# Allegro board 123.brd
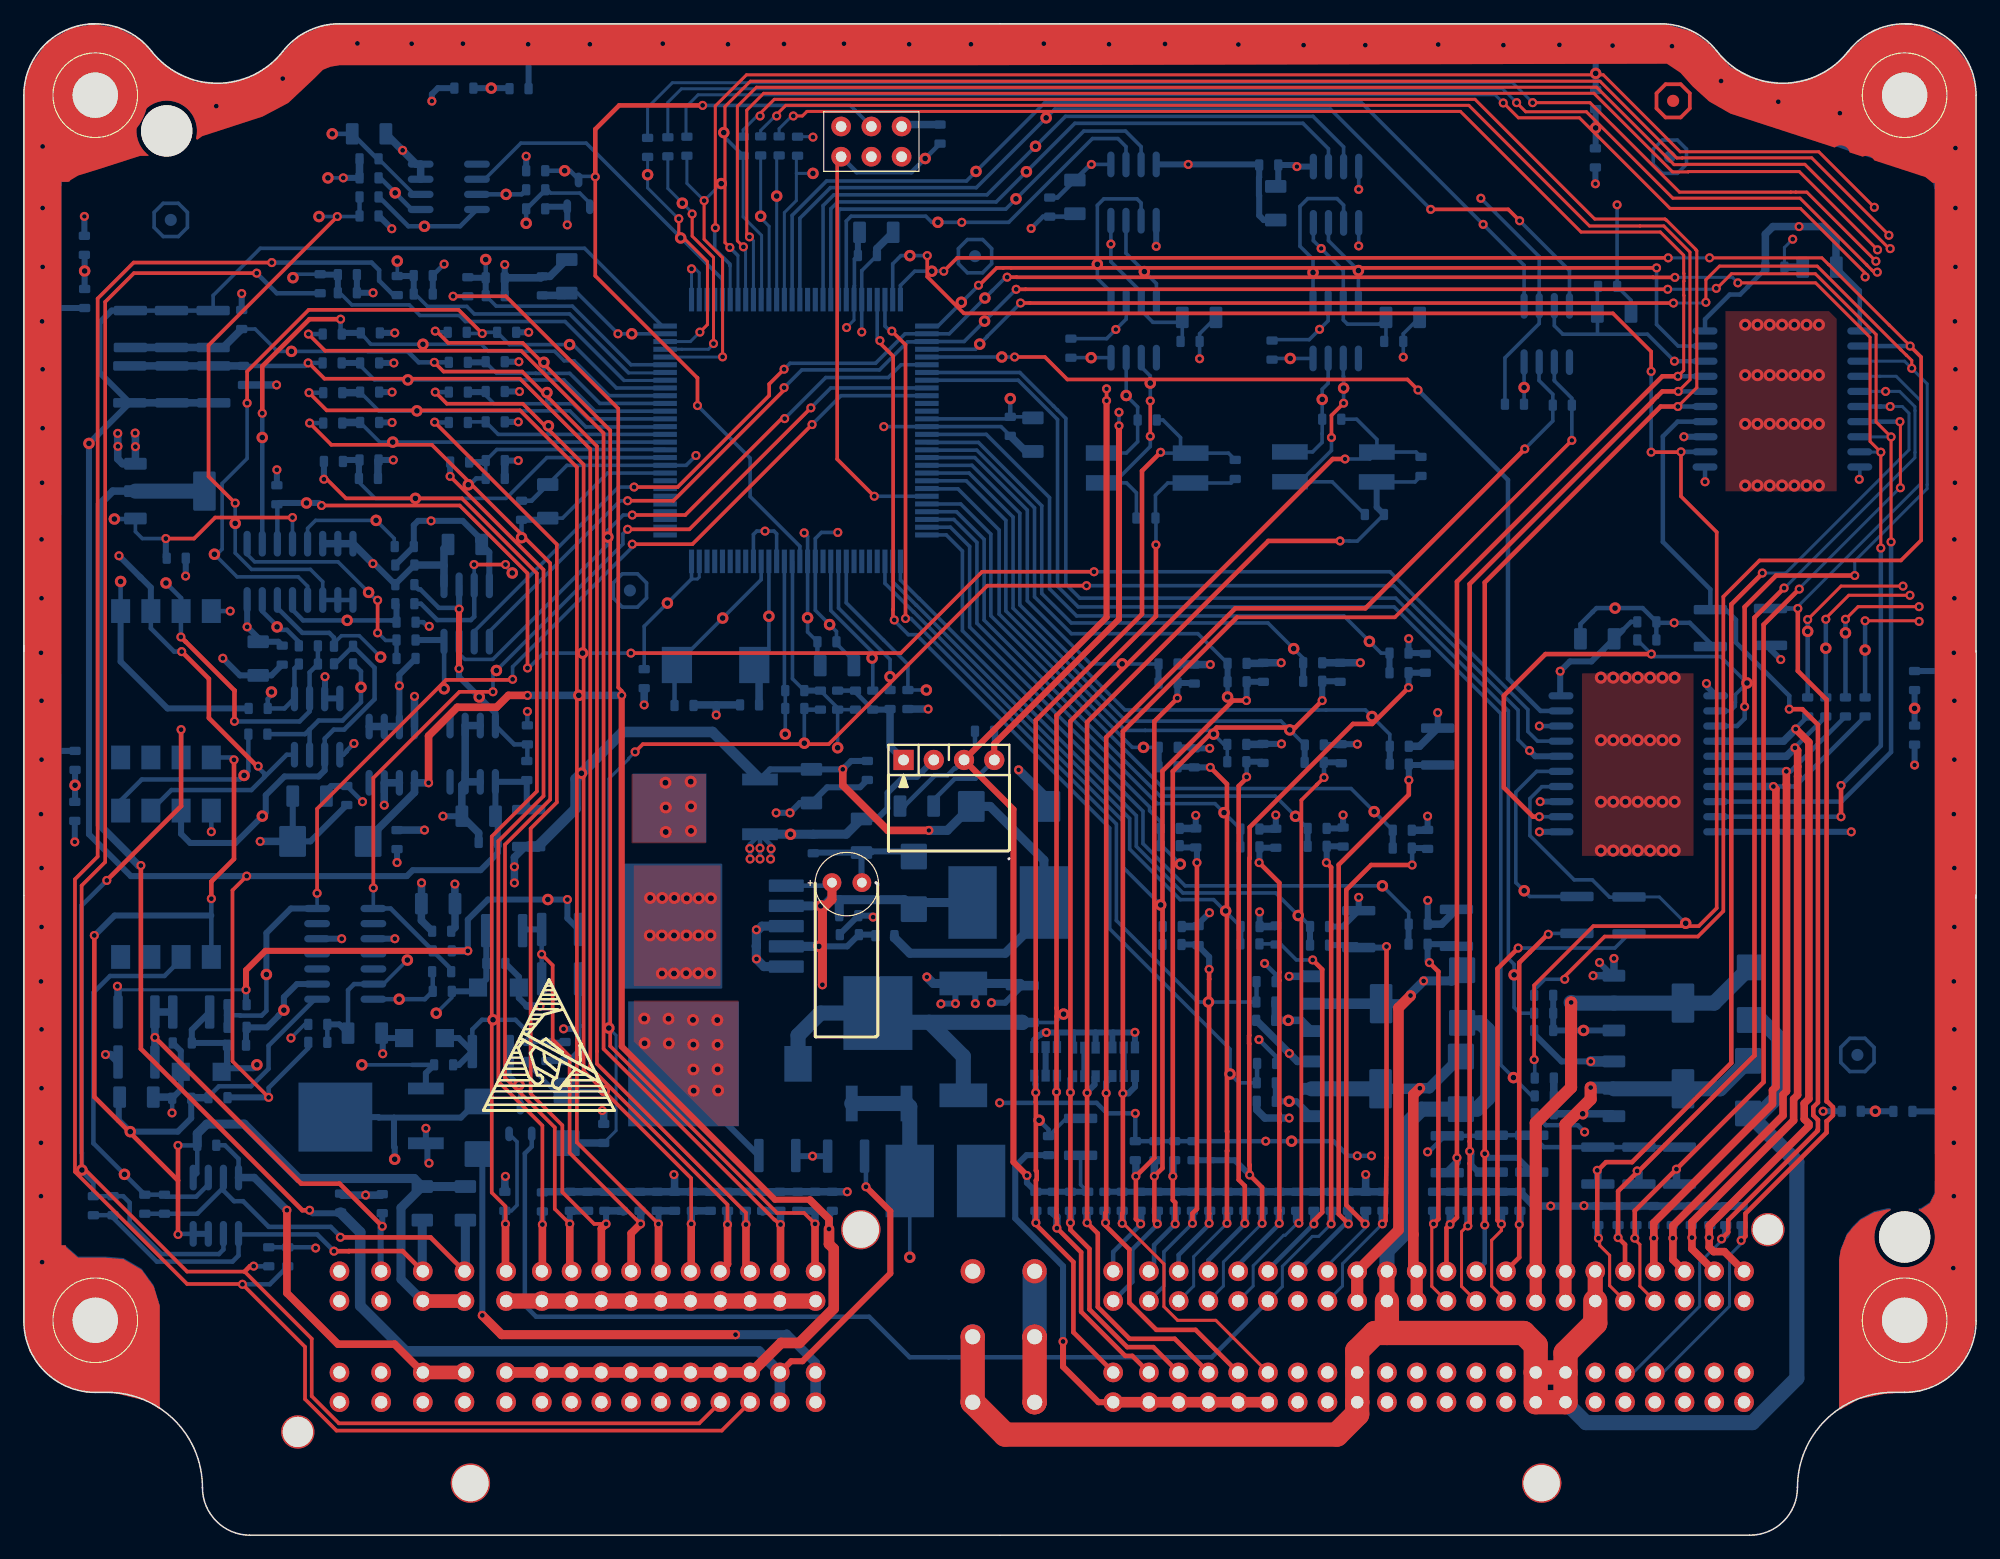
[diagram p0: board, top side]
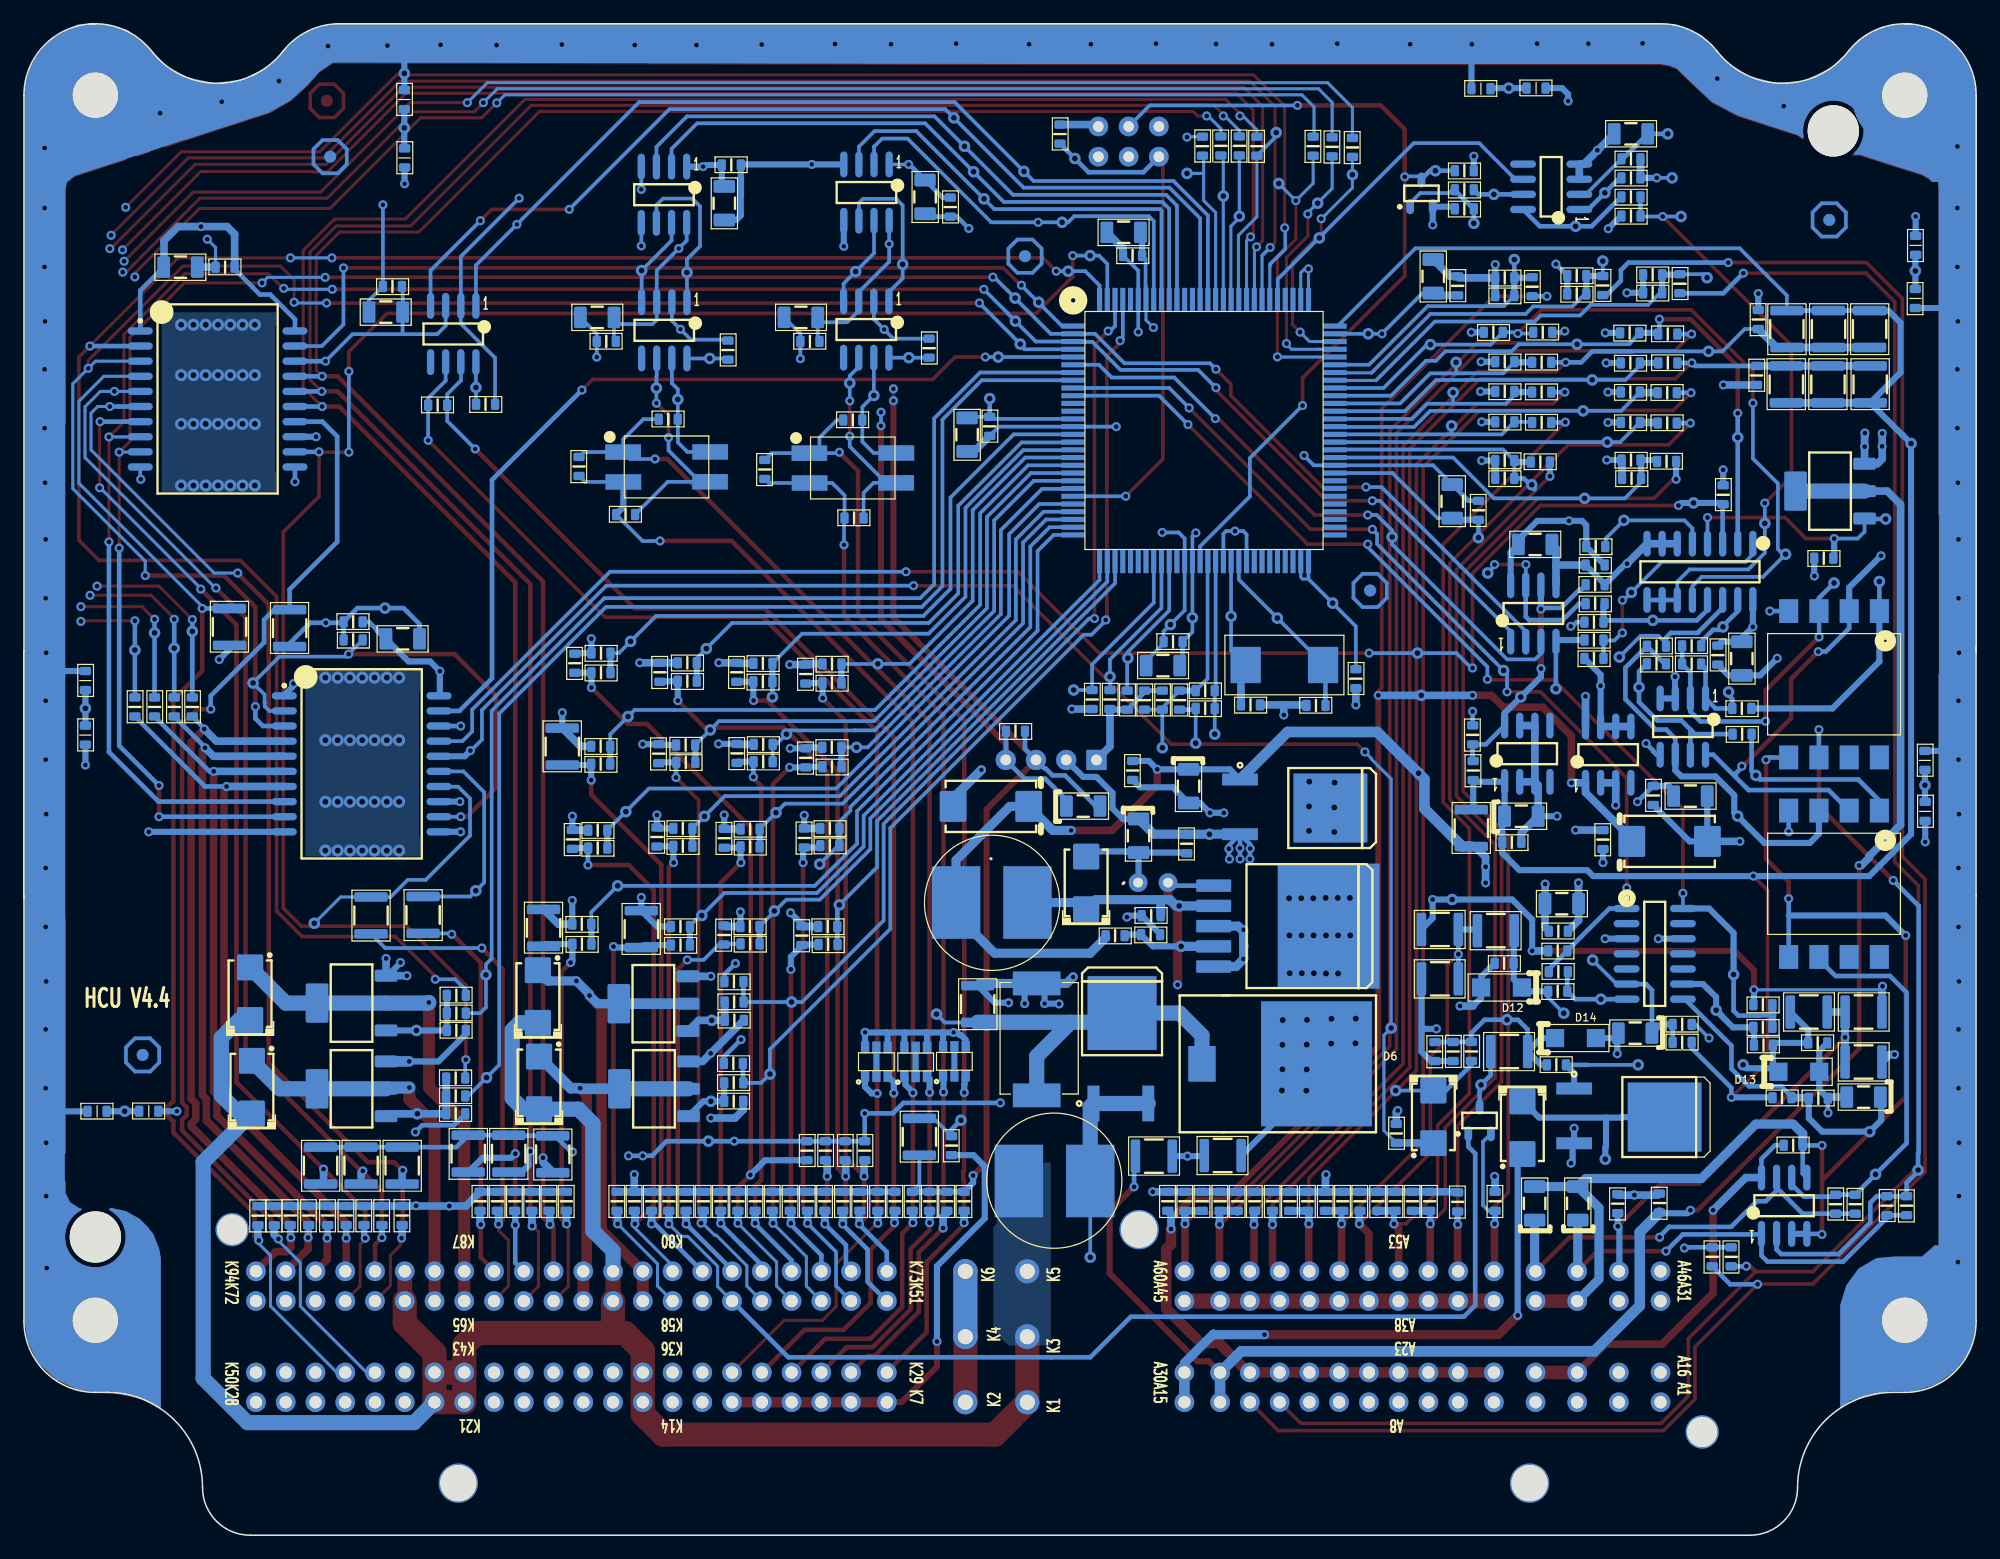
[diagram p1: board, bottom side, seen from below]

Outline 164.02 x 127 mm; copper layers: TOP, GND02, POWER05, BOTTOM. Coordinates in mm from the lower left corner of the outline.
Outline path: 0,121 arc(1.76,125.24) 6,127 ; 0,74.25 0,121.01 ; 0,74.75 0.01,74.75 0.01,53.75 ; 0.01,53.75 0.01,18 arc(1.76,13.76) 6.01,12 7.01,12 arc(12.66,9.66) 15.01,4 arc(16.18,1.17) 19.01,0 82.01,0 145.01,0 arc(147.84,1.17) 149.01,4 arc(151.35,9.66) 157.01,12 158.01,12 arc(162.25,13.76) 164.01,18 164.01,53.75 ; 5.49,126.98 arc(8.4,126.5) 10.73,124.69 arc(16.25,122) 21.77,124.69 arc(23.87,126.39) 26.5,127 ; 26.52,127 82.01,127 ; 71.68,54.74 71.59,54.83 ; 82.76,56.83 82.78,56.85 ; 137.5,127 82,127 ; 137.52,127 arc(140.15,126.39) 142.25,124.69 arc(147.76,122) 153.28,124.69 arc(155.61,126.5) 158.53,126.98 ; 158.01,127 arc(162.25,125.24) 164.01,121 ; 164.01,74.25 164.01,121.01 ; 164.02,74.31 164.02,53.57 163.99,53.54

## Placement (name value [footprint] x y rotation side)
C1  10% 103  [0603]  29 90.35 0 bottom
C2  10% 103  [0603]  29.06 93.5 0 bottom
C3  10% 103  [0603]  29.06 96.05 0 bottom
C4  10% 103  [0603]  29.11 101.03 0 bottom
C5  10% 103  [0603]  27.18 104.39 0 bottom
C6  10% 103  [0603]  39.61 90.3 0 bottom
C7  10% 103  [0603]  39.61 93.55 0 bottom
C8  10% 103  [0603]  39.61 96.1 0 bottom
C9  10% 103  [0603]  40.57 101.08 0 bottom
C10  10% 103  [0603]  33.56 104.29 0 bottom
C11  10% 103  [0603]  29.06 98.5 0 bottom
C12  10% 103  [0603]  39.61 98.6 0 bottom
C13  10% 103  [0603]  29.01 110.85 0 bottom
C14  4.7uF 16V  [1206]  19.69 73.66 270 bottom
C15  10% 104  [0603]  21.71 73.95 270 bottom
C16  10% 103  [0603]  39.61 104.15 0 bottom
C17  10% 103  [0603]  32.11 73.67 0 bottom
C18  4.7uF 16V  [1206]  37.06 83.25 180 bottom
C19  10% 103  [0603]  32.11 76.72 0 bottom
C20  10% 104  [0603]  32.01 81.52 0 bottom
C21  10% 103  [0603]  32.01 79.87 180 bottom
C22  4.7uF 16V  [1206]  24.01 62.1 180 bottom
C23  10% 104  [0603]  23.91 73.2 180 bottom
C24  10% 104  [0603]  27.13 62.15 270 bottom
C25  10% 104  [0603]  26.86 73.22 0 bottom
C28  4.7uF 16V  [1206]  98.74 102.33 180 bottom
C29  10% 104  [0603]  97.98 100.31 180 bottom
C30  4.7uF 16V  [1206]  105.17 111.92 270 bottom
C31  10% 104  [0603]  104.59 115.13 180 bottom
C32  4.7uF 16V  [1206]  115.85 102.33 180 bottom
C33  10% 104  [0603]  115.09 100.31 180 bottom
C34  4.7uF 16V  [1206]  133.61 102.77 0 bottom
C35  10% 104  [0603]  133.06 104.93 0 bottom
C36  4.7uF 16V  [1206]  88.3 112.45 270 bottom
C37  10% 104  [0603]  86.19 111.59 270 bottom
C38  103 30V  [0603]  112.73 28.06 90 bottom
C39  10% 103  [0603]  40.42 28.06 90 bottom
C40  103 30V  [0603]  114.18 28.06 90 bottom
C41  10% 103  [0603]  43.57 28.01 90 bottom
C42  103 30V  [0603]  105.48 28.06 90 bottom
C43  10% 103  [0603]  45.92 28.06 90 bottom
C44  103 30V  [0603]  98.18 28.06 90 bottom
C45  10% 103  [0603]  48.82 28.06 90 bottom
C46  103 30V  [0603]  118.43 28.06 90 bottom
C47  10% 103  [0603]  53.22 28.06 90 bottom
C48  103 30V  [0603]  109.83 28.06 90 bottom
C49  10% 103  [0603]  56.17 28.06 90 bottom
C50  103 30V  [0603]  108.38 28.06 90 bottom
C51  10% 103  [0603]  62.07 28.06 90 bottom
C52  103 30V  [0603]  99.63 28.06 90 bottom
C53  10% 103  [0603]  65.02 28.06 90 bottom
C54  103 30V  [0603]  101.13 28.06 90 bottom
C55  10% 103  [0603]  59.12 28.06 90 bottom
C56  103 30V  [0603]  102.58 28.06 90 bottom
C57  10% 103  [0603]  60.62 28.06 90 bottom
C58  103 30V  [0603]  106.93 28.06 90 bottom
C59  10% 103  [0603]  67.92 28.06 90 bottom
C60  103 30V  [0603]  111.28 28.06 90 bottom
C61  103 30V  [0603]  104.03 28.06 90 bottom
C62  103 30V  [0603]  96.73 28.06 90 bottom
C64  103 30V  [0603]  95.23 28.06 90 bottom
C66  103 30V  [0603]  93.78 28.06 90 bottom
C67  10% 103  [0603]  144.35 26.85 90 bottom
C68  10% 103  [0603]  142.98 26.85 90 bottom
C69  103 30V  [0603]  141.64 26.86 90 bottom
C70  103 30V  [0603]  124.24 28.06 90 bottom
C71  10% 103  [0603]  51.77 28.06 90 bottom
C72  103 30V  [0603]  140.09 26.86 90 bottom
C73  10% 103  [0603]  30.11 27.86 90 bottom
C74  103 30V  [0603]  125.69 28.06 90 bottom
C75  103 30V  [0603]  138.49 26.86 90 bottom
C76  10% 1nf  [0603]  85.03 28.06 90 bottom
C77  103 30V  [0603]  136.94 26.86 90 bottom
C78  10% 1nf  [0603]  86.48 28.06 90 bottom
C79  103 30V  [0603]  133.94 26.86 90 bottom
C80  10% 1nf  [0603]  87.93 28.06 90 bottom
C81  10% 1nf  [0603]  89.38 28.06 90 bottom
C82  10% 1nf  [0603]  90.83 28.06 90 bottom
C83  103 30V  [0603]  122.79 28.06 90 bottom
C84  10% 1nf  [0603]  92.28 28.06 90 bottom
C85  103 30V  [0603]  132.24 26.86 90 bottom
C86  103 30V  [0603]  121.34 28.06 90 bottom
C87  103 30V  [0603]  135.44 26.86 90 bottom
C88  103 30V  [0603]  119.89 28.06 90 bottom
C89  103 30V  [0603]  26.61 27.91 90 bottom
C90  10% 104  [0603]  41.82 86.12 90 bottom
C91  4.7uF 16V  [1206]  44.02 86.87 90 bottom
C92  10% 104  [0603]  43.57 104.98 270 bottom
C93  4.7uF 16V  [1206]  45.62 105.78 270 bottom
C94  10% 470pf  [0603]  64.77 70.97 0 bottom
C95  10% 1nf  [0603]  69.87 70.17 270 bottom
C96  10% 0.22uf  [0603]  68.37 70.17 270 bottom
C97  10% 4.7nf  [0603]  64.77 69.47 0 bottom
C98  10% 104  [0603]  82.88 93.17 270 bottom
C99  4.7uF 16V  [1206]  84.78 92.47 270 bottom
C100  22P 5%  [0603]  60.97 69.77 0 bottom
C101  22P 5%  [0603]  55.47 69.72 180 bottom
C102  10% 104  [0603]  67.47 75.07 180 bottom
C103  4.7uF 16V  [1206]  68.32 73.07 180 bottom
C104  10% 104  [0603]  70.87 107.53 0 bottom
C105  4.7uF 16V  [1206]  71.62 109.48 0 bottom
C106  4.7uF 16V  [1206]  29.01 117.75 180 bottom
C107  10% 103  [0603]  115.81 59.24 0 bottom
C108  10% 103  [0603]  108.66 59.39 0 bottom
C109  10% 103  [0603]  103.01 59.34 0 bottom
C110  10% 103  [0603]  96.31 59.39 0 bottom
C111  10% 103  [0603]  117.15 51.34 0 bottom
C112  10% 103  [0603]  108.86 51.14 0 bottom
C113  10% 103  [0603]  103.02 51.14 0 bottom
C114  10% 103  [0603]  96.48 51.14 0 bottom
C115  10% 103  [0603]  96.14 66.2 0 bottom
C116  10% 103  [0603]  101.91 66.45 0 bottom
C117  10% 103  [0603]  108.42 66.4 0 bottom
C118  10% 103  [0603]  115.56 66.29 0 bottom
C119  10% 103  [0603]  115.53 74.12 0 bottom
C120  10% 103  [0603]  108.28 73.31 0 bottom
C121  10% 103  [0603]  101.93 73.26 0 bottom
C122  10% 103  [0603]  96.13 73.21 0 bottom
C123  4.7uF 16V  [1206]  132.19 75.32 0 bottom
C124  10% 103  [0603]  147.11 106.55 180 bottom
C125  4.7uF 16V  [1206]  150.86 106.55 0 bottom
C126  10% 103  [0603]  136.35 76.74 180 bottom
C127  22uF/35V TAN  [7343]  25.76 58.3 0 bottom
C128  100uF 50V  [RC100]  67.87 57.38 180 top
C129  10% 103  [0603]  69.31 52.06 180 bottom
C130  100uF/16V TAN  [7343]  82.78 61.24 180 bottom
C131  10% 104  [0603]  31.36 58.45 90 bottom
C132  10% 103  [0603]  70.87 64.26 90 bottom
C133  33uF 10V  [1206-C]  66.17 62.94 90 bottom
C134  10% 103  [0603]  66.32 58.1 90 bottom
C135  33uF 10V  [1206-C]  70.37 58.77 90 bottom
C136  33uF 10V  [1206-C]  75.02 61.27 0 bottom
C137  10% 103  [0603]  80.71 67.55 0 bottom
C138  10% 103  [0603]  45.47 40.64 90 bottom
C139  33uF 10V  [1206-C]  38.21 60.42 0 bottom
C140  10% 103  [0603]  39.01 58.21 0 bottom
C141  10% 105  [0603]  15.37 32.77 180 bottom
C142  103 30V  [0603]  20.58 23.39 90 bottom
C143  10% 1nf  [0603]  39.65 48.05 0 bottom
C144  33uF 10V  [1206-C]  9.46 36.81 180 bottom
C145  4.7uF 16V  [1206]  34.81 53.06 180 bottom
C146  10% 1nf  [0603]  13.31 41.36 180 bottom
C147  10% 103  [0603]  35.11 50.75 180 bottom
C148  10% 33pf  [0603]  7.5 27.69 270 bottom
C149  10% 33pf  [0603]  11.82 27.81 270 bottom
C150  103 30V  [0603]  22.18 23.39 90 bottom
C151  33uF 10V  [1206-C]  28.65 42.19 180 bottom
C152  22uF 10V  [1206-C]  33.47 27.88 270 bottom
C153  22uF 10V  [1206-C]  37.1 27.88 270 bottom
C154  10% 0.68uf 50V  [0603]  86.09 32.74 90 bottom
C155  10% 1nf 50V  [0603]  153.53 35.62 180 bottom
C156  10% 1nf 50V  [0603]  132.03 115.73 270 bottom
C157  10% 1nf 50V  [0603]  36.97 121.59 180 bottom
C158  10% 1nf 50V  [0603]  5.09 108.38 90 bottom
C159  10% 1nf 50V  [0603]  4.28 60.82 270 bottom
C160  10% 1nf 50V  [0603]  158.85 67.23 270 bottom
D1  MURS120  [SMB]  145.01 45.5 270 bottom
D2  MURS120  [SMB]  144.86 37.65 270 bottom
D3  MURS120  [SMB]  120.84 45.26 270 bottom
D4  MURS120  [SMB]  120.74 38.01 270 bottom
D6  1.5SMC36AT3G  [DO-218AB]  55.42 39.61 0 bottom
D7  SS14  [SMB-SS14]  74.77 54.81 90 bottom
D8  ES1B  [SMB]  45.61 35.15 90 bottom
D10  ES1B  [SMB]  38.13 34.24 90 bottom
D12  Z 5.1V  [1206-D]  41.59 46.02 180 bottom
D13  Z 5.1V  [1206-D]  13.19 38.94 0 bottom
D14  Z 5.1V  [1206-D]  31.95 41.77 0 bottom
J1  Connecter154-A  [J154]  26.52 11.17 270 top
L1  PSCD0705T-100M-N  [PSS0804]  80.42 29.76 180 bottom
L2  PSCD0705T-101M-N  [PSS0804]  79.71 53.16 0 bottom
MTG*  val  [unnamed]  12 118 0 top
MTG*#2  val  [unnamed]  158.01 25.06 0 top
NOREF  -  [unnamed#2]  6 121 0 top
NOREF#2  -  [unnamed#2]  6.01 18.06 0 top
NOREF#3  -  [#3]  39.63 0 90 top
NOREF#4  -  [#3]  43.69 40.77 0 top
NOREF#5  -  [#3]  0.01 97.28 0 top
NOREF#6  -  [unnamed#2]  158.01 18.06 0 top
NOREF#7  -  [unnamed#2]  158.01 121 0 top
NOREF#8  -  [unnamed#3]  138.56 120.52 270 top
NOREF#9  -  [unnamed#3]  79.91 107.47 270 bottom
NOREF#10  -  [unnamed#3]  154.04 40.36 270 bottom
NOREF#11  -  [unnamed#3]  138.29 115.83 270 bottom
NOREF#12  -  [unnamed#3]  50.92 79.38 270 bottom
NOREF#13  -  [unnamed#3]  12.35 110.52 270 bottom
Q1  MMBT5551  [SOT-23]  46.61 112.75 180 bottom
R1  1% 51k  [0603]  26.01 90.22 180 bottom
R2  5% 51k  [0603]  25.95 93.45 180 bottom
R3  5% 51k  [0603]  25.95 96 180 bottom
R4  5% 51k  [0603]  25.91 100.93 180 bottom
R5  5% 51k  [0603]  24.9 105.16 270 bottom
R6  1% 5.1k  [0603]  28.95 88.8 0 bottom
R7  5% 51k  [0603]  47.37 28.06 90 bottom
R8  5% 10k  [0603]  54.67 28.06 90 bottom
R9  5% 51k  [0603]  63.52 28.06 90 bottom
R10  5% 51k  [0603]  27.18 105.92 0 bottom
R11  1% 51k  [0603]  36.61 90.17 180 bottom
R12  5% 51k  [0603]  36.51 93.5 180 bottom
R13  5% 51k  [0603]  36.51 96.05 180 bottom
R14  5% 51k  [0603]  36.41 101.08 180 bottom
R15  5% 51k  [0603]  31.37 105 270 bottom
R16  1% 5.1k  [0603]  39.61 88.8 0 bottom
R17  5% 51k  [0603]  50.27 28.06 90 bottom
R18  5% 10k  [0603]  57.67 28.06 90 bottom
R19  5% 51k  [0603]  66.47 28.06 90 bottom
R20  5% 51k  [0603]  33.56 105.84 0 bottom
R21  5% 4.7k  [1210]  8.9 96.7 90 bottom
R22  5% 4.7k  [1210]  15.96 96.7 90 bottom
R23  5% 4.7k  [1210]  12.46 96.7 90 bottom
R24  5% 120  [0603]  31.96 83.07 0 bottom
R25  5% 4.7k  [1210]  15.9 101.35 270 bottom
R26  5% 4.7k  [1210]  12.41 101.35 270 bottom
R27  5% 4.7k  [1210]  8.96 101.35 270 bottom
R28  1% 200k  [0603]  26.86 74.7 180 bottom
R29  1% 200k  [0603]  23.91 74.73 180 bottom
R30  5% 51k  [0603]  25.91 98.5 180 bottom
R31  5% 51k  [0603]  36.51 98.55 180 bottom
R32  5% 51k  [0603]  18.46 97.45 270 bottom
R33  5% 51k  [0603]  18.31 102.15 90 bottom
R34  5% 51k  [0603]  29.01 112.45 0 bottom
R35  5% 51k  [0603]  12.81 82.09 0 bottom
R36  5% 4.7k  [1210]  69.08 31.85 180 bottom
R37  5% 51k  [0603]  37.31 104.9 270 bottom
R38  5% 51k  [0603]  39.61 105.65 0 bottom
R39  5% 1k  [0603]  32.01 78.27 0 bottom
R40  5% 1k  [0603]  32.11 75.22 0 bottom
R41  5% 10k  [0603]  157.87 35.61 180 bottom
R42  5% 10k  [0603]  132.05 120.63 270 bottom
R43  5% 390  [0603]  101.77 89.55 90 bottom
R44  5% 1k  [0603]  87.97 99.74 270 bottom
R45  5% 0  [0603]  94.27 85.47 180 bottom
R46  5% 0  [0603]  94.38 93.71 180 bottom
R47  5% 10k  [0603]  41.61 121.55 180 bottom
R48  5% 10k  [0603]  5.11 103.92 90 bottom
R49  5% 390  [0603]  117.38 89.8 90 bottom
R50  5% 1k  [0603]  104.87 99.58 270 bottom
R51  5% 0  [0603]  113.47 85.77 180 bottom
R52  5% 0  [0603]  109.88 93.77 180 bottom
R53  5% 10k  [0603]  4.31 65.1 270 bottom
R54  5% 10k  [0603]  158.85 71.81 270 bottom
R55  5% 120  [0603]  129.25 94.96 180 bottom
R56  5% 1k  [0603]  125.23 95.03 0 bottom
R59  1% 4.7k  [0603]  66.92 70.17 270 bottom
R60  5% 2k  [0603]  74.27 70.22 270 bottom
R61  5% 2k  [0603]  72.77 70.22 270 bottom
R62  5% 2k  [0603]  71.32 70.17 270 bottom
R63  5% 2k  [0603]  65 116.71 270 bottom
R64  5% 2k  [0603]  52.12 71.97 270 bottom
R65  5% 5.1k  [0603]  76.97 117.73 270 bottom
R66  5% 10k  [0603]  43 114.65 0 bottom
R67  5% 5.1k  [0603]  43 113.05 0 bottom
R68  5% 5.1k  [0603]  43 111.45 0 bottom
R69  5% 10k  [0603]  29.01 114.05 0 bottom
R70  5% 120  [0603]  29.01 115.65 0 bottom
R71  5% 51k  [0603]  115.81 57.74 0 bottom
R72  5% 51k  [0603]  108.66 57.89 0 bottom
R73  5% 51k  [0603]  103.01 57.84 0 bottom
R74  5% 51k  [0603]  96.31 57.94 0 bottom
R75  5% 51k  [0603]  117.93 58.46 90 bottom
R76  5% 51k  [0603]  110.83 58.66 90 bottom
R77  5% 10k  [0603]  105.18 58.56 90 bottom
R78  5% 51k  [0603]  98.46 58.59 90 bottom
R79  5% 51k  [0603]  117.13 49.66 0 bottom
R80  5% 51k  [0603]  108.86 49.58 0 bottom
R81  5% 51k  [0603]  103.01 49.68 0 bottom
R82  5% 51k  [0603]  96.46 49.63 0 bottom
R83  5% 10k  [1210]  120.36 51.03 90 bottom
R84  5% 10k  [1210]  112.15 50.93 90 bottom
R85  5% 51k  [0603]  105.21 50.43 90 bottom
R86  5% 51k  [0603]  98.66 50.38 90 bottom
R87  5% 51k  [0603]  96.13 64.57 0 bottom
R88  5% 51k  [0603]  101.91 64.99 0 bottom
R89  5% 51k  [0603]  108.41 64.94 0 bottom
R90  5% 51k  [0603]  115.56 64.79 0 bottom
R91  5% 51k  [0603]  98.33 65.32 90 bottom
R92  5% 51k  [0603]  104.11 65.69 90 bottom
R93  5% 10k  [0603]  110.68 65.67 90 bottom
R94  5% 10k  [1210]  118.79 66.27 90 bottom
R95  5% 51k  [0603]  98.23 32.31 270 bottom
R96  5% 51k  [0603]  96.68 32.31 270 bottom
R97  5% 51k  [0603]  95.03 32.31 270 bottom
R98  5% 51k  [0603]  93.38 32.31 270 bottom
R99  5% 51k  [0603]  115.53 72.47 0 bottom
R100  5% 51k  [0603]  108.28 71.76 0 bottom
R101  5% 51k  [0603]  101.93 71.71 0 bottom
R102  5% 51k  [0603]  96.13 71.61 0 bottom
R103  5% 51k  [0603]  117.73 73.27 90 bottom
R104  5% 51k  [0603]  110.58 72.51 90 bottom
R105  5% 51k  [0603]  104.13 72.51 90 bottom
R106  5% 51k  [0603]  98.33 72.36 90 bottom
R107  5% 4.7k  [1210]  146.74 76.32 90 bottom
R108  5% 4.7k  [1210]  141.69 76.22 90 bottom
R109  5% 4.7k  [1210]  135.69 31.06 270 bottom
R110  5% 4.7k  [1210]  126.69 32.06 270 bottom
R111  5% 4.7k  [1210]  132.24 31.06 270 bottom
R112  5% 4.7k  [1210]  123.29 32.06 270 bottom
R113  5% 4.7k  [1210]  139.09 31.06 270 bottom
R114  5% 4.7k  [1210]  119.59 32.01 270 bottom
R115  5% 2k  [0603]  48.72 33.76 270 bottom
R116  5% 2k  [0603]  21.26 87.42 270 bottom
R117  5% 2k  [1210]  134.85 52.08 270 bottom
R118  5% 2k  [1210]  130.48 52.12 270 bottom
R119  5% 10k  [0603]  136.35 75.23 0 bottom
R120  5% 10k  [0603]  127.69 45.36 180 bottom
R121  5% 10k  [0603]  127.69 43.86 180 bottom
R122  5% 51k  [0603]  127.69 42.41 180 bottom
R123  5% 10k  [0603]  127.74 38.41 180 bottom
R124  5% 10k  [0603]  127.74 36.91 180 bottom
R125  5% 51k  [0603]  127.74 35.41 180 bottom
R126  5% 2k  [0603]  104.35 44.8 180 bottom
R127  5% 51k  [0603]  104.33 43.26 180 bottom
R128  5% 2k  [0603]  104.38 38.01 180 bottom
R129  5% 51k  [0603]  104.38 36.46 180 bottom
R130  1% 4.7k  [0603]  72.34 50.38 0 bottom
R131  5% 51k  [1210]  63.3 31.9 0 bottom
R132  5% 1k  [0603]  69.36 50.46 0 bottom
R133  5% 1k  [0603]  35.27 39.52 180 bottom
R134  5% 1k  [0603]  42.41 40.65 270 bottom
R135  5% 2k  [0603]  104.36 46.51 0 bottom
R136  5% 20k  [0603]  43.95 40.64 270 bottom
R137  5% 10k  [1210]  39.23 40.64 0 bottom
R138  1% 10k  [0603]  42.26 64.25 90 bottom
R139  1% 10k  [0603]  42.31 67.25 90 bottom
R140  5% 120  [1210]  42.42 59.41 90 bottom
R141  5% 10k  [1210]  45.06 50.9 0 bottom
R142  5% 51k  [1210]  45.06 46.75 0 bottom
R143  5% 10k  [1210]  40.36 50.8 0 bottom
R144  5% 10k  [0603]  35.16 45.7 0 bottom
R145  5% 1k  [0603]  35.16 49.1 0 bottom
R146  1% 10k  [0603]  16.31 36.76 0 bottom
R147  5% 15K  [0603]  13.26 36.71 180 bottom
R148  1% 100K  [0603]  35.11 47.35 180 bottom
R149  5% 10k  [1210]  9.46 43.96 180 bottom
R150  5% 51k  [1210]  9.46 39.76 180 bottom
R151  5% 10k  [1210]  14.06 43.96 180 bottom
R152  5% 10k  [0603]  17.87 41.18 180 bottom
R153  5% 1k  [0603]  17.92 44.58 0 bottom
R154  5% 200  [0603]  19.69 69.47 0 bottom
R155  5% 200  [0603]  19.66 67.31 0 bottom
R156  1% 100K  [0603]  17.92 42.68 0 bottom
R157  1% 200k  [0603]  5.85 27.69 90 bottom
R158  1% 200k  [0603]  10.17 27.81 90 bottom
R159  5% 51k  [0603]  149.87 69.6 270 bottom
R160  5% 51k  [0603]  154.69 69.6 270 bottom
R161  5% 51k  [0603]  153.04 69.6 270 bottom
R162  5% 51k  [0603]  151.39 69.6 270 bottom
R163  5% 51k  [0603]  63.45 116.74 90 bottom
R164  5% 51k  [0603]  61.9 116.74 90 bottom
R165  5% 51k  [0603]  60.43 116.71 90 bottom
R166  5% 51k  [0603]  55.71 116.71 90 bottom
R167  5% 51k  [0603]  54.11 116.66 90 bottom
R168  5% 51k  [0603]  52.41 116.61 90 bottom
R169  1% 10k  [0603]  24.7 41.41 180 bottom
R170  5% 15K  [0603]  24.7 42.92 180 bottom
R171  5% 1  [1210]  88.78 33.47 90 bottom
R172  5% 2k  [0603]  104.41 39.64 0 bottom
R173  SMD185F  [3425]  78.91 41.84 270 bottom
R174  0  [1210]  83.89 44.63 270 bottom
U1  4053  [SO16]  23.21 80.95 0 bottom
U2  NIF5002  [SOT-223]  12.28 87.73 90 bottom
U3  LM2904/ON  [SO8]  24.64 67.94 0 bottom
U4  TLV5617AID  [SO8]  37.21 77.45 180 bottom
U6  TLE6250  [SO8]  93.25 101.31 0 bottom
U9  TLE6250  [SO8]  110.22 101.24 0 bottom
U12  TLE6250  [SO8]  127.95 100.93 0 bottom
U14  MC9S12XDP512MAL  [9S12]  75.87 101.6 180 bottom
U15  NX8045GB  [XTAL]  61.37 73.12 180 bottom
U16  com6  [IDC6]  68.67 115.83 90 top
U17  MAX813L  [SO8]  35.71 113.3 90 bottom
U18  L9825  [POWERSO20]  147.74 95.47 270 bottom
U19  L9825  [POWERSO20]  135.64 64.82 270 bottom
U20  NIF5002  [SOT-223]  136.49 44.71 90 bottom
U21  NIF5002  [SOT-223]  136.49 37.51 90 bottom
U22  NIF5002  [SOT-223]  111.13 44.66 90 bottom
U23  NIF5002  [SOT-223]  111.08 37.51 90 bottom
U24  LM2576  [TO170P1420X465-6]  57.95 51.18 270 bottom
U25  LM2931  [SO8]  30.92 65.59 180 bottom
U26  LM7805  [DPAK]  56.85 61.2 270 bottom
U27  B0505S/D-1W  [SIP4]  73.91 65.14 0 top
U28  BTS118D  [DPAK]  28.78 35.23 270 bottom
U29  TL431B  [SO8]  37.71 65.67 180 bottom
U30  LM239  [SO14]  27.01 48.85 270 bottom
U31  -  [HCNR201]  8.13 77.65 270 bottom
U32  -  [HCNR201]  8.13 60.89 270 bottom
U33  MC33202D  [SO8]  16.13 27.69 180 bottom
U34  MURD620CTG  [DPAK]  71.86 41.27 180 bottom
U35  MMBD4148CC  [SOT-23]  41.72 34.85 180 bottom
U37  ADuM1201  [SO8]  93.23 112.82 0 bottom
U38  ADuM1201  [SO8]  110.24 112.63 0 bottom
U39  B82790S513N201  [IND0163-B]  94.38 89.67 180 bottom
U40  B82790S513N201  [IND0163-B]  110.03 89.76 180 bottom
U41  MMQA33VT1  [SC-74]  85.84 39.81 90 bottom
U42  MMQA33VT1  [SC-74]  89.1 39.77 90 bottom
U43  MMQA33VT1  [SC-74]  92.4 39.78 90 bottom

## Library data of the parts
C1-C25 C141 C148 C149 = C: User Part Number: pn; Tolerance: RichardLC; room: ROOM_Analog
C28-C37 C154 = C: User Part Number: pn; Tolerance: RichardLC; room: ROOM_CAN
C38-C62 C64 C66-C89 C142 C150 C155-C160 = C: User Part Number: pn; Tolerance: RichardLC; room: ROOM_Connector
C90-C106 = C: User Part Number: pn; Tolerance: RichardLC; room: ROOM_Control
C107-C126 = C: User Part Number: pn; Tolerance: RichardLC; room: ROOM_Digital
C127 C129-C140 C152 C153 = C: User Part Number: pn; Tolerance: RichardLC; room: ROOM_Power
C128 = C: room: ROOM_Power
C143-C147 C151 = C: User Part Number: pn; Tolerance: RichardLC; room: ROOM_Speed
D1-D4 D8 D10 = D1N4007: User Part Number: pn; Tolerance: RichardLC; room: ROOM_Power
D6 = D1N4954_0: room: ROOM_Power
D7 = D1N5822: User Part Number: pn; Tolerance: RichardLC; room: ROOM_Power
D12 D13 = D1N4954: room: ROOM_Power
D14 = D1N4007: room: ROOM_Power
J1 = Connecter154: Tolerance: RichardLC; room: ROOM_Connector
L1 L2 = L: room: ROOM_Power
MTG* MTG*#2 = -: User Part Number: partnum; Tolerance: RichardLC
Q1 = MM5262_1: User Part Number: pn; Tolerance: RichardLC
R1-R40 R154 R155 R157 R158 = R: User Part Number: pn; Tolerance: RichardLC; room: ROOM_Analog
R41 R42 R47 R48 R53 R54 R130-R134 R136-R140 R174 = R: User Part Number: pn; Tolerance: RichardLC; room: ROOM_Power
R43-R46 R49-R52 R55 R56 R171 = R: User Part Number: pn; Tolerance: RichardLC; room: ROOM_CAN
R59-R70 = R: User Part Number: pn; Tolerance: RichardLC; room: ROOM_Control
R71-R119 R159-R168 = R: User Part Number: pn; Tolerance: RichardLC; room: ROOM_Digital
R120-R129 R135 R172 = R: User Part Number: pn; Tolerance: RichardLC; room: ROOM_Drive
R141-R153 R156 R169 R170 = R: User Part Number: pn; Tolerance: RichardLC; room: ROOM_Speed
R173 = R: room: ROOM_Power
U1 = 4053-2: User Part Number: pn; Tolerance: RichardLC; room: ROOM_Analog
U2 = NIF5002: User Part Number: pn; Tolerance: RichardLC; room: ROOM_Analog
U3 U33 = LM2904/ON: User Part Number: partnum; Tolerance: RichardLC; room: ROOM_Analog
U4 = TLC5617: User Part Number: partnum; Tolerance: RichardLC; room: ROOM_Analog
U6 U9 U12 = TLE6250: User Part Number: partnum; Tolerance: RichardLC; room: ROOM_CAN
U14 = 9S12: room: ROOM_Control
U15 = CRYSTAL: room: ROOM_Control
U16 = com6: room: ROOM_Control
U17 = MAX813L: User Part Number: partnum; Tolerance: RichardLC; room: ROOM_Control
U18 U19 = L9825-21: User Part Number: pn; Tolerance: RichardLC; room: ROOM_Digital
U20-U23 = NIF5002: User Part Number: pn; Tolerance: RichardLC; room: ROOM_Drive
U24 = LM2576: User Part Number: pn; Tolerance: RichardLC; room: ROOM_Power
U25 = LM2931: User Part Number: partnum; Tolerance: RichardLC; room: ROOM_Power
U26 = LM7805: User Part Number: pn; Tolerance: RichardLC
U27 = B_S-1W: User Part Number: pn; Tolerance: RichardLC
U28 = BTS118D: User Part Number: pn; Tolerance: RichardLC
U29 = TL431B-SO8: User Part Number: partnum; Tolerance: RichardLC; room: ROOM_Power
U30 = LM239_0: User Part Number: pn; Tolerance: RichardLC; room: ROOM_Speed
U31 U32 = HCNR201_0
U34 = MURD620CTG: User Part Number: pn; Tolerance: RichardLC
U35 = MMBD4148CC_3: User Part Number: pn; Tolerance: RichardLC
U37 U38 = ADuM1201: User Part Number: partnum; Tolerance: RichardLC
U39 U40 = B82790S513N201
U41-U43 = MMQA33VT1_0

## Footprints (pads in the part's own frame, mm; a bottom-side part is the same pattern mirrored in y, then rotated)
9S12
  rect 1.981x0.432 smd: 1(0,0) 2(0,-0.65) 3(0,-1.3) 4(0,-1.95) 5(0,-2.6) 6(0,-3.25) 7(0,-3.9) 8(0,-4.55) 9(0,-5.2) 10(0,-5.85) 11(0,-6.5) 12(0,-7.15) 13(0,-7.8) 14(0,-8.45) 15(0,-9.1) 16(0,-9.75) 17(0,-10.4) 18(0,-11.05) 19(0,-11.7) 20(0,-12.35) 21(0,-13) 22(0,-13.65) 23(0,-14.3) 24(0,-14.95) 25(0,-15.6) 26(0,-16.25) 27(0,-16.9) 28(0,-17.55) 57(21.99,-17.55) 58(21.99,-16.9) 59(21.99,-16.25) 60(21.99,-15.6) 61(21.99,-14.95) 62(21.99,-14.3) 63(21.99,-13.65) 64(21.99,-13) 65(21.99,-12.35) 66(21.99,-11.7) 67(21.99,-11.05) 68(21.99,-10.4) 69(21.99,-9.75) 70(21.99,-9.1) 71(21.99,-8.45) 72(21.99,-7.8) 73(21.99,-7.15) 74(21.99,-6.5) 75(21.99,-5.85) 76(21.99,-5.2) 77(21.99,-4.55) 78(21.99,-3.9) 79(21.99,-3.25) 80(21.99,-2.6) 81(21.99,-1.95) 82(21.99,-1.3) 83(21.99,-0.65) 84(21.99,0)
  rect 0.432x1.981 smd: 29(2.22,-19.77) 30(2.87,-19.77) 31(3.52,-19.77) 32(4.17,-19.77) 33(4.82,-19.77) 34(5.47,-19.77) 35(6.12,-19.77) 36(6.77,-19.77) 37(7.42,-19.77) 38(8.07,-19.77) 39(8.72,-19.77) 40(9.37,-19.77) 41(10.02,-19.77) 42(10.67,-19.77) 43(11.32,-19.77) 44(11.97,-19.77) 45(12.62,-19.77) 46(13.27,-19.77) 47(13.92,-19.77) 48(14.57,-19.77) 49(15.22,-19.77) 50(15.87,-19.77) 51(16.52,-19.77) 52(17.17,-19.77) 53(17.82,-19.77) 54(18.47,-19.77) 55(19.12,-19.77) 56(19.77,-19.77) 85(19.77,2.22) 86(19.12,2.22) 87(18.47,2.22) 88(17.82,2.22) 89(17.17,2.22) 90(16.52,2.22) 91(15.87,2.22) 92(15.22,2.22) 93(14.57,2.22) 94(13.92,2.22) 95(13.27,2.22) 96(12.62,2.22) 97(11.97,2.22) 98(11.32,2.22) 99(10.67,2.22) 100(10.02,2.22) 101(9.37,2.22) 102(8.72,2.22) 103(8.07,2.22) 104(7.42,2.22) 105(6.77,2.22) 106(6.12,2.22) 107(5.47,2.22) 108(4.82,2.22) 109(4.17,2.22) 110(3.52,2.22) 111(2.87,2.22) 112(2.22,2.22)
0603
  custom 0.7x0.95 smd: 1(-0.8,0) 2(0.8,0)
1206
  custom 1.076x1.8 smd: 1(-1.413,0) 2(1.413,0)
1206-C
  custom 1.076x1.8 smd: 1(-1.413,0) 2(1.413,0)
1206-D
  rect 1.524x1.524 smd: 1(0,0) 2(3.429,0)
1210
  custom 0.8x2.8 smd: 1(-1.55,0) 2(1.55,0)
3425
  rect 2x4 smd: 1(-4.516,-0.02) 2(4.884,-0.02)
7343
  custom 2.25x2.6 smd: 1(-3.175,0) 2(3.175,0)
DO-218AB
  rect 9.3x10.5 smd: 1(0,0)
  rect 2.3x3 smd: 2(9.62,0)
DPAK
  rect 1x3 smd: 1(-2.3,-5) 3(2.3,-5)
  rect 5.8x6.2 smd: 2(0.1,2.6)
HCNR201
  rect 2x1.6 smd: 1(0,0) 2(0,-2.54) 3(0,-5.08) 4(0,-7.62) 5(12.3,-7.62) 6(12.3,-5.08) 7(12.3,-2.54) 8(12.3,0)
IDC6
  round 1.651 hole 0.889: 1(0,0) 2(0,-2.54) 3(0,-5.08) 4(2.54,-5.08) 5(2.54,-2.54) 6(2.54,0)
IND0163-B
  rect 3x1.3 smd: 1(-3.65,1.25) 2(3.66,1.26) 3(3.65,-1.25) 4(-3.63,-1.26)
J154
  round 2.794 hole 2.54: (-14.5,120) (2.5,-3.5)
  round 3.302 hole 3.048: (-14.5,43.8) (6.8,101) (6.8,11)
  round 1.651 hole 1.041: A1(0,0) A2(0,3.5) A3(0,7) A4(0,10.5) A5(0,14) A6(0,17) A7(0,19.5) A8(0,22) A9(0,24.5) A10(0,27) A11(0,29.5) A12(0,32) A13(0,34.5) A14(0,37) A15(0,40) A16(-2.5,0) A17(-2.5,3.5) A18(-2.5,7) A19(-2.5,10.5) A20(-2.5,14) A21(-2.5,17) A22(-2.5,19.5) A23(-2.5,22) A24(-2.5,24.5) A25(-2.5,27) A26(-2.5,29.5) A27(-2.5,32) A28(-2.5,34.5) A29(-2.5,37) A30(-2.5,40) A31(-8.5,0) A32(-8.5,3.5) A33(-8.5,7) A34(-8.5,10.5) A35(-8.5,14) A36(-8.5,17) A37(-8.5,19.5) A38(-8.5,22) A39(-8.5,24.5) A40(-8.5,27) A41(-8.5,29.5) A42(-8.5,32) A43(-8.5,34.5) A44(-8.5,37) A45(-8.5,40) A46(-11,0) A47(-11,3.5) A48(-11,7) A49(-11,10.5) A50(-11,14) A51(-11,17) A52(-11,19.5) A53(-11,22) A54(-11,24.5) A55(-11,27) A56(-11,29.5) A57(-11,32) A58(-11,34.5) A59(-11,37) A60(-11,40) K7(0,65) K8(0,68) K9(0,70.5) K10(0,73) K11(0,75.5) K12(0,78) K13(0,80.5) K14(0,83) K15(0,85.5) K16(0,88) K17(0,90.5) K18(0,93) K19(0,95.5) K20(0,98) K21(0,100.5) K22(0,103) K23(0,105.5) K24(0,108) K25(0,110.5) K26(0,113) K27(0,115.5) K28(0,118) K29(-2.5,65) K30(-2.5,68) K31(-2.5,70.5) K32(-2.5,73) K33(-2.5,75.5) K34(-2.5,78) K35(-2.5,80.5) K36(-2.5,83) K37(-2.5,85.5) K38(-2.5,88) K39(-2.5,90.5) K40(-2.5,93) K41(-2.5,95.5) K42(-2.5,98) K43(-2.5,100.5) K44(-2.5,103) K45(-2.5,105.5) K46(-2.5,108) K47(-2.5,110.5) K48(-2.5,113) K49(-2.5,115.5) K50(-2.5,118) K51(-8.5,65) K52(-8.5,68) K53(-8.5,70.5) K54(-8.5,73) K55(-8.5,75.5) K56(-8.5,78) K57(-8.5,80.5) K58(-8.5,83) K59(-8.5,85.5) K60(-8.5,88) K61(-8.5,90.5) K62(-8.5,93) K63(-8.5,95.5) K64(-8.5,98) K65(-8.5,100.5) K66(-8.5,103) K67(-8.5,105.5) K68(-8.5,108) K69(-8.5,110.5) K70(-8.5,113) K71(-8.5,115.5) K72(-8.5,118) K73(-11,65) K74(-11,68) K75(-11,70.5) K76(-11,73) K77(-11,75.5) K78(-11,78) K79(-11,80.5) K80(-11,83) K81(-11,85.5) K82(-11,88) K83(-11,90.5) K84(-11,93) K85(-11,95.5) K86(-11,98) K87(-11,100.5) K88(-11,103) K89(-11,105.5) K90(-11,108) K91(-11,110.5) K92(-11,113) K93(-11,115.5) K94(-11,118)
  round 2.032 hole 1.27: K1(0,53.2) K2(0,58.4) K3(-5.5,53.2) K4(-5.5,58.4) K5(-11,53.2) K6(-11,58.4)
POWERSO20
  oval 0.61x2.1 smd: 1(-5.715,-6.5) 2(-4.445,-6.5) 3(-3.175,-6.5) 4(-1.905,-6.5) 5(-0.635,-6.5) 6(0.635,-6.5) 7(1.905,-6.5) 8(3.175,-6.5) 9(4.445,-6.5) 10(5.715,-6.5) 11(5.715,6.5) 12(4.445,6.5) 13(3.175,6.5) 14(1.905,6.5) 15(0.635,6.5) 16(-0.635,6.5) 17(-1.905,6.5) 18(-3.175,6.5) 19(-4.445,6.5) 20(-5.715,6.5)
PSS0804
  rect 4.064x6.096 smd: 1(0,0) 2(5.994,0)
RC100
  round 1.575 hole 0.813: 1(-2.54,2.54) 2(-0.025,2.54)
SC-74
  rect 1x0.7 smd: 1(-1.2,0.95) 2(-1.2,0) 3(-1.2,-0.95) 4(1.2,-0.95) 5(1.2,0) 6(1.2,0.95)
SIP4
  rect 1.7x1.7 hole 0.9: 1(0,0)
  round 1.7 hole 0.9: 2(2.54,0) 3(5.08,0) 4(7.62,0)
SMB
  custom 2.17x2.2 smd: 1(-2.21,0) 2(2.21,0)
SMB-SS14
  custom 2.17x2.2 smd: 1(-2.21,0) 2(2.21,0)
SO8
  oval 0.61x2.17 smd: 1(-1.905,-2.365) 2(-0.635,-2.365) 3(0.635,-2.365) 4(1.905,-2.365) 5(1.905,2.365) 6(0.635,2.365) 7(-0.635,2.365) 8(-1.905,2.365)
SO14
  oval 0.61x2.17 smd: 1(-3.81,-2.365) 2(-2.54,-2.365) 3(-1.27,-2.365) 4(0,-2.365) 5(1.27,-2.365) 6(2.54,-2.365) 7(3.81,-2.365) 8(3.81,2.365) 9(2.54,2.365) 10(1.27,2.365) 11(0,2.365) 12(-1.27,2.365) 13(-2.54,2.365) 14(-3.81,2.365)
SO16
  oval 0.61x2.17 smd: 1(-4.445,-2.365) 2(-3.175,-2.365) 3(-1.905,-2.365) 4(-0.635,-2.365) 5(0.635,-2.365) 6(1.905,-2.365) 7(3.175,-2.365) 8(4.445,-2.365) 9(4.445,2.365) 10(3.175,2.365) 11(1.905,2.365) 12(0.635,2.365) 13(-0.635,2.365) 14(-1.905,2.365) 15(-3.175,2.365) 16(-4.445,2.365)
SOT-23
  oval 0.65x1.25 smd: 1(-0.95,-1.125) 2(0.95,-1.125) 3(0,1.125)
SOT-223
  custom 1x1.9 smd: 1(-2.3,-2.9) 2(0,-2.9) 3(2.3,-2.9)
  custom 3.3x1.9 smd: 4(0,2.9)
TO170P1420X465-6
  custom 1.04x2.94 smd: 1(-3.4,-6.105) 2(-1.7,-6.105) 3(0,-6.105) 4(1.7,-6.105) 5(3.4,-6.105)
  custom 10.51x8.55 smd: 6(0,3.55)
unnamed
  round 5.588 hole 4.318 unplated: (0,0)
unnamed#2
  round 8.89 hole 3.81: 1(0,0)
unnamed#3
  round 1.016 smd: 1(0,0)
XTAL
  rect 2.54x3.048 smd: 1(0,0) 2(6.5,0)

## Nets
7V: C14.1 C15.1 C22.1 C24.1 C130.2 C131.2 C132.2 C133.2 C145.2 C147.2 L2.2 R130.2 R140.1 U1.16(VCC) U25.8(INPUT) U26.1(VIN) U30.3(V+)
24V: C128.2 R36.2 R95.1 R96.1 R97.1 R98.1 R109.1 R110.1 R111.1 R112.1 R113.1 R114.1 R131.2 R173.1 R174.1 U24.1(IN)
GND: U24.6(GND#6)
GND2: C1.2 C2.2 C3.2 C4.2 C5.2 C6.2 C7.2 C8.2 C9.2 C10.2 C11.2 C12.2 C13.2 C14.2 C15.2 C16.2 C17.2 C18.2 C19.2 C20.2 C21.2 C22.2 C24.2 C30.2 C31.2 C34.2 C35.2 C36.2 C37.2 C38.2 C39.2 C40.2 C41.2 C42.2 C43.2 C44.2 C45.2 C46.2 C47.2 C48.2 C49.2 C50.2 C51.2 C52.2 C53.2 C54.2 C55.2 C56.2 C57.2 C58.2 C59.2 C60.2 C61.2 C62.2 C64.2 C66.2 C67.2 C68.2 C69.2 C70.2 C71.2 C72.2 C73.2 C74.2 C75.2 C77.2 C79.2 C82.2 C83.2 C84.2 C85.2 C86.2 C87.2 C88.2 C89.2 C90.2 C91.2 C92.1 C93.1 C95.1 C96.1 C98.2 C99.2 C100.1 C101.1 C102.1 C103.1 C104.1 C105.1 C106.1 C107.2 C108.2 C109.2 C110.2 C111.2 C112.2 C113.2 C114.2 C115.2 C116.2 C117.2 C118.2 C119.2 C120.2 C121.2 C122.2 C123.2 C124.2 C125.2 C126.2 C127.1 C128.1 C129.1 C130.1 C131.1 C132.1 C133.1 C134.1 C135.1 C138.1 C139.1 C140.1 C142.2 C143.2 C144.1 C145.1 C146.2 C147.1 C150.2 C151.1 C155.2 C156.2 C157.2 C158.2 C159.2 C160.2 D6.1 D7.2(1) D12.1 D13.1 D14.1 J1.A32 J1.A35 J1.A36 J1.A37 J1.A38 J1.A39 J1.A40 J1.A41 J1.A42 J1.A43 J1.A44 J1.A45 J1.K2 J1.K4 J1.K6 J1.K24 J1.K25 Q1.2(E) R6.2 R7.2 R8.2 R9.2 R10.2 R16.2 R17.2 R18.2 R19.2 R20.2 R32.2 R33.2 R35.2 R38.2 R56.1 R61.2 R62.2 R68.2 R75.2 R76.2 R77.2 R78.2 R83.2 R84.2 R85.2 R86.2 R91.2 R92.2 R93.2 R94.2 R103.2 R104.2 R105.2 R106.2 R122.2 R125.2 R127.2 R129.2 R131.1 R132.1 R136.2 R139.2 R142.2 R147.2 R150.2 R170.2 U1.6(INH) U1.7(VEE) U1.8(GND) U2.3(SOURCE) U3.3(+) U3.4(V-) U3.5(+) U4.5(GND) U12.2(GND) U14.14(VSS1) U14.40(VSSR1) U14.45(VSSPLL) U14.48(TEST) U14.66(VSS2) U14.85(VRL) U14.86(VSSA) U14.106(VSSX) U16.6 U17.3(GND) U17.4(PFI) U18.1(GND1) U18.10(GND10) U18.11(GND11) U18.20(GND20) U19.1(GND1) U19.10(GND10) U19.11(GND11) U19.20(GND20) U20.3(SOURCE) U21.3(SOURCE) U22.3(SOURCE) U23.3(SOURCE) U24.3(GND#3) U24.5(O/F) U25.2(GND#2) U25.3(GND#3) U25.5(INHIBIT) U25.6(GND#6) U25.7(GND#7) U26.2(GND) U27.1(GND) U28.3(S) U29.2(ANODE#2) U29.3(ANODE#3) U29.6(ANODE#6) U29.7(ANODE#7) U30.12(V-) U31.4(PD1-A) U32.4(PD1-A) U37.4(GND1) U38.4(GND1) U41.4 U41.6 U42.4 U42.6 U43.4 U43.6
VCC: C18.1 C20.1 C30.1 C31.1 C34.1 C35.1 C36.1 C37.1 C92.2 C93.2 C102.2 C103.2 C104.2 C105.2 C123.1 C124.1 C125.1 C126.1 C134.2 C135.2 R24.2 R60.2 R63.1 R64.2 R65.1 R66.1 R69.1 R70.1 R107.1 R108.1 R115.1 R116.1 R119.2 R135.2 R141.2 R145.2 R149.2 R153.2 R172.2 U3.8(V+) U4.8(VDD) U12.3(VCC) U14.41(VDDR1) U14.83(VDDA) U14.107(VDDX) U16.4 U18.13(VCC) U18.18(NRES) U19.13(VCC) U19.18(NRES) U26.3(VOUT) U27.2(VIN) U31.2(LED-A) U32.2(LED-A) U37.1(VDD1) U38.1(VDD1)
VCC-OUT: C59.1 C127.2 J1.A17 J1.A20 J1.A21 J1.A22 J1.A23 J1.A24 J1.A25 J1.A26 J1.A27 J1.A28 R37.2 U25.1(OUTPUT)
VDD1: C98.1 C99.1 U14.13(VDD1)
VDD2: C90.1 C91.1 U14.65(VDD2)
VDDPLL: C94.2 C95.2 C96.2 R59.1 U14.43(VDDPLL)
AC_CONTROL: C69.1 J1.K94 R159.2 U19.4(OUT1)
AC_REQUEST: C40.1 J1.K58 R80.2 R84.1
ADM_COMMAND: C88.1 J1.K84 R114.2 R163.2 U18.17(OUT8)
ADM_WAKE_UP: C86.1 J1.K63 R112.2 R164.2 U18.16(OUT6)
AN00: C1.1 R1.1 R6.1 U14.67(PAD00/AN00)
AN01: C2.1 R2.1 U14.69(PAD01/AN01)
AN02: C3.1 R3.1 U14.71(PAD02/AN02)
AN03: C11.1 R30.1 U14.73(PAD03/AN03)
AN04: C4.1 R4.1 U1.2(Y0) U14.75(PAD04/AN04)
AN05: C5.1 R5.1 R10.1 U14.77(PAD05/AN05)
AN06: C16.1 R37.1 R38.1 U14.79(PAD06/AN06)
AN08: C6.1 R11.1 R16.1 U14.68(PAD08/AN08)
AN09: C7.1 R12.1 U14.70(PAD09/AN09)
AN10: C8.1 R13.1 U14.72(PAD10/AN10)
AN11: C12.1 R31.1 U14.74(PAD11/AN11)
AN12: C9.1 R14.1 U1.12(X0) U14.76(PAD12/AN12)
AN13: C10.1 R15.1 R20.1 U14.78(PAD13/AN13)
ANALOG1: C142.1 J1.A12 R5.2
ANALOG2: C150.1 J1.A13 R15.2
ANALOG7: C47.1 J1.A55 R3.2 R8.1
ANALOG8: C49.1 J1.A56 R13.2 R18.1
APP_SGN1_VEH: C51.1 J1.A59 R4.2 R9.1
APP_SGN2_VEH: C53.1 J1.A60 R14.2 R19.1
B_PWM_OUT1: C67.1 J1.K47 R107.2 U18.4(OUT1)
B_PWM_OUT2: C68.1 J1.K46 R108.2 U18.14(OUT2)
BKGD: R65.2 U14.23(MODC/BKGD) U16.1
BPP_SGN: C45.1 J1.A53 R12.2 R17.1
BPP_SW1: C66.1 J1.K73 R98.2 R102.2 R106.1
BPP_SW2: C62.1 J1.K74 R96.2 R100.2 R104.1
BPP_SW3: C52.1 J1.K75 R82.2 R86.1
CAN_SH: C154.1 J1.K7 J1.K8 J1.K9 J1.K10 J1.K11 J1.K12
CANGND: C28.1 C29.1 C32.1 C33.1 C76.2 C78.2 C80.2 C81.2 C136.1 C137.1 R44.1 R50.1 R171.1 U6.2(GND) U9.2(GND) U27.3(CANGND) U37.5(GND2) U38.5(GND2)
CANHI0: C76.1 J1.K29 R43.2 R46.1 U39.1 U41.3
CANHI1: C80.1 J1.K31 R49.2 R52.1 U40.1 U42.3
CANHI4: C82.1 J1.K33 R55.2 U12.7(CANH) U43.3
CANLO0: C78.1 J1.K30 R43.1 R45.1 U39.4 U41.1
CANLO1: C81.1 J1.K32 R49.1 R51.1 U40.4 U42.1
CANLO4: C84.1 J1.K34 R55.1 U12.6(CANL) U43.1
CANVCC: C28.2 C29.2 C32.2 C33.2 C136.2 C137.2 U6.3(VCC) U9.3(VCC) U27.4(CANVCC) U37.8(VDD2) U38.8(VDD2)
CLUTCH_SW1: C56.1 J1.K76 R88.2 R92.1
CLUTCH_SW2: C42.1 J1.K77 R73.2 R77.1
CLUTH_SGN: C43.1 J1.A52 R2.2 R7.1
DIGITAL1: C64.1 J1.K51 R97.2 R101.2 R105.1
DIGITAL2: C38.1 J1.K80 R71.2 R75.1
DM_ENABLE: C83.1 J1.K85 R110.2 R165.2 U18.15(OUT4)
ECM_AC: C79.1 J1.K90 R109.2 R166.2 U18.5(OUT3)
ECM_APP1: C23.1 R29.1 U3.2(-) U31.3(PD1-C)
ECM_APP2: C25.1 R28.1 U3.6(-) U32.3(PD1-C)
EMS-GND: C141.2 C152.1 C153.1 J1.A33 J1.A34 U31.5(PD2-A) U32.5(PD2-A) U33.3(+) U33.4(V-) U33.5(+)
EMS-VCC: C141.1 J1.A18 J1.A19 U33.8(V+)
EMS_APP_SGN1: C148.2 C152.2 J1.A48 R157.1 U33.1(OUT)
EMS_APP_SGN2: C149.2 C153.2 J1.A49 R158.1 U33.7(OUT)
EV_ENABLE_SW: C60.1 J1.K79 R90.2 R94.1
EXTAL: C100.2 U14.46(EXTAL) U15.1
FAN_CONTROL: C75.1 J1.K92 R161.2 U19.6(OUT5)
FAULT_LED1: C70.1 J1.K64 R117.2
FAULT_LED2: C74.1 J1.K86 R118.2
HCU_APP_SGN1: C17.1 R40.1 U1.1(Y1)
HCU_APP_SGN2: C19.1 R39.1 U1.13(X1)
ICE_KEY: C89.1 J1.A14 J1.A29 R36.1 U2.2(DRAIN) U2.4(DRAIN2)
IDLE_IN: C50.1 J1.K78 R81.2 R85.1
IDLE_OUT: C85.1 J1.K68 R111.2 R167.2 U18.6(OUT5)
MGND: R41.1 R42.1 R47.1 R48.1 R53.1 R54.1
NEUTRAL: C44.1 J1.K52 R74.2 R78.1
PAD07: R167.1 U14.81(PAD07/AN07)
PAD14: R166.1 U14.80(PAD14/AN14)
PAD15: R168.1 U14.82(PAD15/AN15)
PB0: C107.1 R71.1 U14.24(PB0)
PB1: C108.1 R72.1 U14.25(PB1)
PB2: C109.1 R73.1 U14.26(PB2)
PB3: C110.1 R74.1 U14.27(PB3)
PB4: C111.1 R79.1 U14.28(PB4)
PB5: C112.1 R80.1 U14.29(PB5)
PB6: C113.1 R81.1 U14.30(PB6)
PB7: C114.1 R82.1 U14.31(PB7)
PE5: R62.1 U14.38(PE5)
PE6: R61.1 U14.37(PE6)
PE7: R60.1 U14.36(\X\C\L\K\S/PE7)
PJ0: C115.1 R87.1 U14.22(RXD2/KWJ0/PJ0)
PJ1: C116.1 R88.1 U14.21(TXD2/KWJ1/PJ1)
PK0: R124.2 U14.8(PK0)
PK1: R121.2 U14.7(PK1)
PK2: U4.3(C\S\) U14.6(PK2)
PK3: U14.5(PK3) U19.19(NCS)
PK4: C117.1 R89.1 U14.20(PK4)
PK5: C118.1 R90.1 U14.19(PK5)
PLUG-IN: C48.1 J1.K56 R72.2 R76.1 U35.1(AN1)
POW_CTRL1: D8.1 R115.2 U19.16(OUT6)
PP0: U14.4(MISO1/PWM0/KWP0/PP0) U18.3(SDO) U19.3(SDO)
PP1: U4.1(DIN) U14.3(MOSI1/PWM1/KWP1/PP1) U18.8(SDI) U19.8(SDI)
PP2: U4.2(SCLK) U14.2(SCK1/PWM2/KWP2/PP2) U18.9(CLK) U19.9(CLK)
PP3: U14.1(\S\S\1/PWM3/KWP3/PP3) U18.19(NCS)
PP4: R120.2 U14.112(PP4/KWP4/PWM4/MISO2) U18.2(MON1)
PP5: R123.2 U14.111(PP5/KPW5/PWM5/MOSI2) U18.12(MON2)
PP6: R126.2 R135.1 U14.110(PP6/KWP6/PWM6/\S\S\2)
PP7: R128.2 R172.1 U14.109(PP7/KWP7/PWM7/SCK2)
PS0: U14.89(PS0/RXD0) U17.6(WDI)
PS1: R160.1 U14.90(PS1/TXD0)
PS2: R161.1 U14.91(PS2/RXD1)
PS3: R162.1 U14.92(PS3/TXD1)
PS4: R159.1 U14.93(PS4/MISO0)
PS5: R165.1 U14.94(PS5/MOSI0)
PS6: R164.1 U14.95(PS6/SCK0)
PS7: R163.1 U14.96(PS7/\S\S\0)
PT0: R145.1 R148.1 U14.9(IOC0/PT0) U30.1(OUT)
PT1: R153.1 R156.1 U14.10(IOC1/PT1) U30.14(OUT)
PT4: C119.1 R99.1 U14.15(IOC4/PT4)
PT5: C120.1 R100.1 U14.16(IOC5/PT5)
PT6: C121.1 R101.1 U14.17(IOC6/PT6)
PT7: C122.1 R102.1 U14.18(IOC7/PT7)
PUMP_CONTROL: C72.1 J1.K93 R162.2 U19.5(OUT3)
PWM_IN1: C71.1 J1.A54 R141.1 R142.1 R143.2
PWM_IN2: C73.1 J1.A47 R149.1 R150.1 R151.2
RESET: Q1.3(C) R66.2 U14.42(\R\E\S\E\T) U16.5
RST: R67.1 U17.7(RESET)
RUN: D1.2 D2.2 D3.2 D4.2 J1.K1 J1.K3 J1.K5 J1.K15 J1.K21 J1.K22 J1.K37 J1.K43 J1.K44 J1.K60 J1.K67 J1.K82 J1.K89 L1.1
RUN0: C39.1 J1.A50 R1.2 U35.2(AN2)
RUN1_CONTROL: D10.1 J1.A15 J1.A30
RUN2_CONTROL: R116.2 U1.3(Z1) U19.17(OUT8)
RUN11: C41.1 J1.A51 R11.2
RXCAN0: U14.105(PM0/RXCAN0) U37.2(VOA)
RXCAN1: U14.103(PM2/RXCAN1/RXCAN0/MISO0) U38.2(VOA)
RXCAN4: U12.4(RXD) U14.99(PJ6/KWJ6/RXCAN4/SDA0/RXCAN0)
SHIFT_REQUEST: C58.1 J1.K55 R89.2 R93.1
SOCN: C61.1 J1.K54 R95.2 R99.2 R103.1
SOCP: C54.1 J1.K53 R87.2 R91.1
START_IN: C46.1 J1.K62 R79.2 R83.1
START_OUT: C87.1 J1.K69 R113.2 R168.2 U18.7(OUT7)
STARTER_CONTROL: C77.1 J1.K91 R160.2 U19.7(OUT7)
THW1: C55.1 J1.A57 R21.2 R22.2 R23.2 R30.2 R32.1
THW2: C57.1 J1.A58 R25.2 R26.2 R27.2 R31.2 R33.1
TXCAN0: U14.104(PM1/TXCAN0) U37.3(VIB)
TXCAN1: U14.102(PM3/TXCAN1/TXCAN0/\S\S\0) U38.3(VIB)
TXCAN4: U12.1(TXD) U14.98(PJ7/KWJ7/TXCAN4/SCL0/TXCAN0)
VALVE1: D4.1 J1.K61 J1.K83 U23.2(DRAIN) U23.4(DRAIN2)
VALVE2: D3.1 J1.K59 J1.K81 U22.2(DRAIN) U22.4(DRAIN2)
VALVE3: D2.1 J1.K66 J1.K88 U21.2(DRAIN) U21.4(DRAIN2)
VALVE4: D1.1 J1.K65 J1.K87 U20.2(DRAIN) U20.4(DRAIN2)
VREF-2.5: C21.1 R138.2 R139.1 U4.6(REF) U29.8(REF)
VREF_SPEED0: C151.2 R169.1 R170.1 U30.6(-)
VREF_SPEED1: C144.2 R146.1 R147.1 U30.8(-)
VRH: C139.2 C140.2 R21.1 R22.1 R23.1 R25.1 R26.1 R27.1 R138.1 R140.2 R146.2 R169.2 U14.84(VRH) U29.1(CATHODE)
WDO: R34.2 U17.8(W\D\O\)
XFC: C94.1 C97.1 U14.44(XFC)
XTAL: C101.2 U14.47(XTAL) U15.2
N00760: R130.1 R132.2 U24.4(FEEDBAK)
N03289: C129.2 D7.1(2) L2.1 U24.2(OUT)
N22192: D8.2 R134.2
N24739: C138.2 D14.2 R133.1 R134.1 R136.1 R137.1
N41983: U6.4(RXD) U37.7(VIA)
N42156: U6.1(TXD) U37.6(VOB)
N50201: R45.2 U6.6(CANL) U39.3
N50415: R46.2 U6.7(CANH) U39.2
N55809: U9.4(RXD) U38.7(VIA)
N55821: U9.1(TXD) U38.6(VOB)
N58750: R56.2 U12.8(RS)
N64625: C143.1 D12.2 R143.1 R144.2
N65147: R144.1 R148.2 U30.7(+)
N72845: C146.1 D13.2 R151.1 R152.2
N72853: R152.1 R156.2 U30.9(+)
N201070: R137.2 U35.3(CA)
N432521: R63.2 U14.97(VREGEN)
N432655: R64.1 U14.55(\I\R\Q/PE1) U14.56(\X\I\R\Q/PE0)
N432687: C97.2 R59.2
N441491: Q1.1(B) R67.2 R68.1
N451610: R69.2 U17.1(M\R\)
N481001: C106.2 R70.2 U17.2(VCC)
N536377: R29.2 U1.15(Y)
N536553: R28.2 U1.14(X)
N536989: C13.1 R34.1 U1.9(C) U1.10(B) U1.11(A)
N537451: R24.1 U1.5(Z0)
N537851: R39.2 U4.7(OUTB)
N537931: R40.2 U4.4(OUTA)
N540997: R35.1 U1.4(Z) U2.1(GATE)
N590723: C25.2 R155.2 U3.7(OUT)
N610821: R120.1 R121.1 R122.1 U20.1(GATE)
N619832: R123.1 R124.1 R125.1 U21.1(GATE)
N620988: R126.1 R127.1 U22.1(GATE)
N621666: R128.1 R129.1 U23.1(GATE)
N840872: R133.2 U28.1(IN)
N2302479: R117.1 U19.14(OUT2)
N2303199: R118.1 U19.15(OUT4)
N2303531: R119.1 U19.2(MON1) U19.12(MON2)
N2457356: D6.2 R173.2 R174.2 U34.2(N)
N2646393: R154.1 U31.1(LED-C)
N2665998: C23.2 R154.2 U3.1(OUT)
N2679435: R155.1 U32.1(LED-C)
N2713125: C148.1 R157.2 U31.6(PD2-C) U33.2(-)
N2736433: C149.1 R158.2 U32.6(PD2-C) U33.6(-)
N3255725: L1.2 U34.1(A1) U34.3(A2)
N3335562: C154.2 R171.2
N16728889: D10.2 U28.2(D)
N16775079: R51.2 U9.6(CANL) U40.3
N16775127: R52.2 U9.7(CANH) U40.2
N16786001: R50.2 U9.8(RS)
N16786048: R44.2 U6.8(RS)
N16786589: U42.2 U42.5
N16786676: U43.2 U43.5
N16786767: U41.2 U41.5
N16797299: C155.1 R41.2
N16797329: C156.1 R42.2
N16797351: C157.1 R47.2
N16797389: C158.1 R48.2
N16797417: C159.1 R53.2
N16797449: C160.1 R54.2

Pads without a net: J1 A1 A2 A3 A4 A5 A6 A7 A8 A9 A10 A11 A16 A31 A46 K13 K14 K16 K17 K18 K19 K20 K23 K26 K27 K28 K35 K36 K38 K39 K40 K41 K42 K45 K48 K49 K50 K57 K70 K71 K72; NOREF 1; NOREF#2 1; NOREF#6 1; NOREF#7 1; NOREF#8 1; NOREF#9 1; NOREF#10 1; NOREF#11 1; NOREF#12 1; NOREF#13 1; U6 5; U9 5; U12 5; U14 11 12 32 33 34 35 39 49 50 51 52 53 54 57 58 59 60 61 62 63 64 87 88 100 101 108; U16 2 3; U17 5; U25 4; U29 4 5; U30 2 4 5 10 11 13; U31 7 8; U32 7 8

## Via types
v1: diameter 0.965, hole 0.483, TOP to BOTTOM, 156 vias
v2: diameter 0.762, hole 0.406, TOP to BOTTOM, 460 vias
v3: diameter 0.762, hole 0.381, TOP to BOTTOM, 57 vias
v4: diameter 1.016, hole 0.508, TOP to BOTTOM, 91 vias

## Routing (per net, layer and track width the routed paths; a pad name or vN(x,y) marks a point on that pad's centre or on a via; arc(x,y) is an arc through that point)
7V: length 103
  TOP w0.635: v2(68.8,64.35) 68.8,63.01 72.6,59.22 v3(76.04,59.22)
  BOTTOM w0.381: C24.1 v2(28.45,61.63)
  BOTTOM w0.508: C24.1 25.83,62.95 25.42,62.55 C22.1 ; C132.2 69.5,65.06 v2(68.8,64.35) 68.8,64.35 C133.2 62.7,64.35 U26.1 ; C15.1 21.38,75.07 C14.1 19.69,75.4 v2(18.76,76.33) U1.16 ; U30.3 v2(31.17,50.12)
  BOTTOM w0.635: R140.1 42.12,57.87 41.22,56.96 v2(41.22,56.16) v2(41.22,54.81) ; v2(33.41,54.81) 33.41,53.08 C145.2 33.4,51.65 C147.2 ; v2(33.66,59.25) C131.2 31.36,59.25 31.43,59.25 ; U25.8 v2(32.82,70.48)
  BOTTOM w0.762: v3(76.04,59.22) 77.58,59.22 C130.2 81.18,61.24 85.7,56.72 L2.2 85.7,52.15 82.45,48.9 74.44,48.9 73.14,50.2 R130.2
  BOTTOM w0.889: R140.1 43.18,57.87 46.36,61.05 46.36,63.53 v1(46.85,64.03) 50.31,67.49 57.85,67.49 U26.1
24V: length 88.4
  TOP w0.762: C128.2 67.89,53.41 67.09,52.61 v2(67.09,46.25)
  BOTTOM w0.381: v2(117.93,32.21) 118.03,32.21 119.38,33.56 ; R113.1 R109.1 R111.1 127.69,32.61 R110.1 R112.1 123.24,33.56 R114.1 119.38,33.56 ; U24.1 67.64,54.58 C128.2 ; 119.38,33.56 119.33,33.56 ; 67.48,31.9 R36.2 ; v2(113.22,31.88) v2(112.03,31.88) 111.26,31.88 110.03,33.11 v1(106.5,33.11) v3(104.34,33.11) R95.1 R96.1 R97.1 R98.1 v3(93.38,35.45) 91.01,35.45 90.12,36.33 v2(81.98,36.33)
  BOTTOM w0.508: R131.2 64.9,31.85 v3(66.26,31.85) R36.2 ; v3(79.94,44.67) 79.94,46.36 ; R174.1 82.45,44.74 v3(81.29,44.74) ; 78.27,46.36 v3(78.27,44.67) 77.07,44.67 v3(77.05,44.64)
  BOTTOM w0.762: v3(75.87,46.91) 76.41,46.36 R173.1 83.71,46.36 R174.1
GND:
  vias: v4(52.62,53.55) v4(52.59,50.4) v4(53.63,53.55) v4(53.61,50.4) v4(53.61,47.2) v4(54.65,53.55) v4(54.63,50.4) v4(54.63,47.2) v4(55.64,47.22) v4(55.69,53.52) v4(55.67,50.4) v4(56.71,53.52) v4(56.68,50.4) v4(56.66,47.22) v4(57.72,53.52) v4(57.7,50.4) v4(57.67,47.22)
GND2: length 620.4
  TOP w1.27: J1.A35 J1.A36 J1.A37 J1.A38 J1.A39 J1.A40 J1.A41 J1.A42 J1.A43 J1.A44 J1.A45
  TOP w2.032: J1.K4 84.92,16.67 84.92,11.18 J1.K2
  BOTTOM w0.254: v2(69.12,101.48) 69.75,102.1 U14.106 ; U14.85 v2(56.1,106.41) 56.42,106.41 56.75,106.08 U14.86
  BOTTOM w0.305: C91.2 45.63,89.9 U14.66 55.64,89.9 v2(56.47,90.72) ; R170.2 23.59,42.92 v2(22.44,41.77) ; v3(122.41,112.34) 127.31,107.43 U12.2 127.31,101.81 124.43,98.93 R56.1 ; U38.4 v3(112.15,113.08) ; U14.45 63.25,84.15 63.02,84.37 v2(62.27,84.37) 61.58,84.37 61.3,84.09 U14.48 ; U18.10 154.24,88.77 v2(154.2,88.72) ; C34.2 135.02,103.76 C35.2 v3(133.86,111.79) ; C103.1 69.74,73.46 68.27,74.92 C102.1 68.27,75.94 v1(67.7,76.52) 66.5,77.72 U14.40 66.5,83.75 67.01,84.26 v2(68.38,84.26) ; R62.2 71.32,69.52 ; U14.106 69.75,104.81 69.77,104.84 69.77,104.98 69.78,104.99 69.78,107.24 C104.1 ; v2(72.25,93.15) U14.14 82.1,93.15 C98.2
  BOTTOM w0.381: U32.4 v2(15.75,59.11) ; R147.2 12.46,35.5 v2(12.45,35.48) ; C96.1 C95.1 69.87,70.82 R62.2 ; U18.1 154.24,104.58 C125.2 ; v2(35.31,106.81) 34.36,105.85 R20.2 ; R125.2 126.94,35.38 127.87,34.45 130.55,34.45 v2(131.12,33.88) ; C91.2 42.65,86.92 C90.2 ; U18.11 v2(141.24,88.51) ; U18.20 141.24,102.17 143.32,104.25 144.19,104.25 144.83,104.89 144.83,104.89 146.31,106.38 146.31,106.55 C124.2 ; 134.32,76.04 135.02,76.74 C126.2 ; v2(27.73,66.53) 27.14,65.93 27.14,65.87 26.85,65.58 U3.5 ; v2(34.06,76.37) 33.91,76.37 33.56,76.72 C19.2 ; v3(84.63,109.8) 85.62,110.79 C37.2 88.06,110.79 C36.2 ; C142.2 C150.2 24.45,24.19 v2(24.52,24.13) ; U31.4 v2(17.34,77.65) ; R139.2 v2(42.31,69.22) ; R10.2 28.07,105.92
  BOTTOM w0.508: C1.2 v2(31.04,90.35) ; 46.6,42.77 46.38,42.55 v2(45.34,42.55) ; 46.6,42.77 R142.2 ; 46.6,42.77 46.6,40.63 45.81,39.84 C138.1 R136.2 ; v2(30.91,109.78) 29.84,110.85 C13.2 ; v2(110.83,60.52) R76.2 110.76,59.39 C108.2 ; R33.2 v2(18.31,104.33) ; C66.2 C84.2 C82.2 ; 86.79,42.24 86.79,42.23 U41.6 ; 86.79,42.24 v3(85.91,42.24) 85.61,42.24 85.39,42.02 85.28,42.02 84.89,41.63 U41.4 ; 86.79,42.24 88.23,42.24 ; v2(99.63,66.12) R91.2 98.25,66.2 C115.2 ; v2(112.03,66.47) R93.2 110.62,66.4 C117.2 ; C156.2 v3(132.03,113.56) ; 42.27,44.46 41.59,45.14 D12.1 41.59,46.92 40.46,48.05 C143.2 ; C24.2 24.08,58.3 C127.1 22.59,58.31 C22.2 ; C8.2 v2(41.64,96.1) ; C17.2 31.55,72.31 31.55,71.37 ; 88.23,42.24 90.03,42.24 ; 88.23,42.24 88.15,42.15 U42.4 ; 90.03,42.24 90.05,42.22 U42.6 ; 90.03,42.24 91.51,42.24 ; 31.55,71.37 v2(31.55,71.37) ; 31.55,71.37 U25.7 ; R92.2 v2(105.66,66.49) ; v2(34.04,31.26) 33.91,31.4 33.91,32.8 U28.3 v2(33.78,34.19) ; C15.2 20.81,72.25 C14.2 18.16,72.25 v2(16.72,73.69) ; U37.4 v3(97.83,115.18) 103.74,115.18 C31.2 103.79,114.1 103.77,114.08 103.77,112.58 103.79,112.56 103.79,110.89 104.17,110.51 C30.2 ; C158.2 v3(5.09,110.81) ; C4.2 v2(31.16,101.03) ; v2(30.15,40.46) 30.15,42.1 ; 30.15,42.1 C151.1 ; 30.15,42.1 30.48,41.77 D14.1 ; R20.2 C10.2 ; R94.2 v2(118.79,69.12) ; R122.2 126.89,42.11 129.19,39.81 v2(131.64,39.81) ; v2(45.66,110.1) Q1.2 43.98,111.63 R68.2 ; R10.2 C5.2 v2(29.34,104.39) ; C11.2 v2(31.09,98.5) ; R62.2 72.72,69.37 R61.2 ; v2(141.36,71.56) 141.48,71.45 141.48,71.25 142.14,70.58 U19.1 ; C112.2 110.81,51.14 R84.2 v2(112.15,53.59) ; 134.32,76.04 133.6,75.32 C123.2 131.7,73.42 129.89,73.42 v2(129.07,72.6) 129.07,70.6 U19.20 ; C9.2 v2(42.42,101.08) ; R78.2 v2(98.46,60.49) ; C135.1 70.37,54.87 C128.1 ; C135.1 66.38,57.36 C134.1 ; C135.1 70.39,57.36 70.41,57.38 71.22,57.38 71.29,57.45 74.34,57.45 D7.2 ; v2(63.21,60.7) v2(64.37,60.7) 65.2,61.53 C133.1 67.49,62.84 70.25,62.84 C132.1 ; R38.2 v2(40.41,106.77) ; 91.51,42.24 91.45,42.18 U43.4 ; 91.51,42.24 93.33,42.24 v3(93.35,42.26) U43.6 ; v2(99.61,52.3) 98.66,51.35 R86.2 ; v2(25.3,72.14) 25.3,70.34 25.28,70.31 U3.4 ; v2(116.35,75.33) 116.33,75.32 C119.2 117.68,74.12 R103.2 ; C155.2 v3(151.16,35.62) ; C159.2 v3(4.28,58.25) ; v2(71.35,51.94) 71.23,52.06 C129.1 68.56,50.51 R132.1 ; v2(13.59,80.59) 13.61,80.61 R35.2 ; 133.46,47.01 132.38,48.09 v2(132.38,48.12) ; C6.2 v2(41.54,90.3) ; R75.2 v2(117.93,60.42) ; C146.2 13.19,40.69 D13.1 13.19,37.44 R147.2 ; C104.1 70.07,109.34 C105.1 ; v2(35.21,60.42) C139.1 ; C2.2 v2(30.94,93.5) ; C20.2 31.21,79.92 C21.2 29.45,81.64 v2(29.33,81.64) ; v2(127.33,59.1) 129.14,59.1 U19.11 ; C113.2 v2(103.82,52.37) ; C12.2 v2(41.59,98.6) ; C3.2 v2(30.94,96.05) ; C157.2 34.79,121.59 34.28,121.08 v3(34.28,120.5) ; C131.1 v2(31.36,56.52) ; R77.2 v2(105.18,60.52) ; U19.10 142.14,59.1 153.52,59.1 v2(153.53,59.1) ; R131.1 61.73,31.9 v4(56.28,37.35) ; C160.2 v3(158.85,64.71) ; C111.2 v2(117.95,53.34) ; U30.12 v2(26.71,50.12) ; C7.2 v2(41.54,93.55)
  BOTTOM w0.635: v2(36.21,54.71) 36.21,53.08 C145.1 36.23,51.07 C147.1 ; v2(69.18,28.86) C59.2 R19.2 C53.2 R9.2 C51.2 C57.2 C55.2 R18.2 C49.2 R8.2 ; U22.3 v2(106.3,46.96) ; 28.71,28.61 28.76,28.66 28.84,28.57 30.03,28.57 C73.2 ; 28.71,28.61 v2(28.71,28.57) ; 28.71,28.61 28.68,28.57 26.74,28.57 C89.2 ; U29.7 U29.6 U29.3 ; 35.3,81.47 35.3,82.91 C18.2 ; 35.3,81.47 35.25,81.52 C20.2 ; 35.3,81.47 U4.5 ; 7.89,91.48 v2(7.89,92.58) ; 7.89,91.48 7.89,90.44 8.3,90.03 U2.3 v2(9.38,91.47) 9.38,92.36 9.35,92.38 v2(9.35,92.61) ; 7.89,91.48 v2(7.91,91.49) ; v2(19.86,58.3) C127.1 22.58,59.21 ; R85.2 105.12,51.14 C113.2 ; 131.04,27.66 v2(131.07,27.69) ; 131.04,27.66 C85.2 C79.2 C87.2 C77.2 C75.2 C72.2 C69.2 141.65,27.65 C68.2 C67.2 ; 131.04,27.66 v2(128.28,27.66) 126.89,27.66 C74.2 C70.2 C83.2 C86.2 C88.2 C46.2 ; R86.2 98.62,51.14 C114.2 ; R32.2 v2(21.23,96.65) ; R92.2 104.07,66.45 C116.2 ; C121.2 104.08,73.26 R105.2 v2(105.63,73.31) ; R94.2 117.26,66.29 C118.2 ; R8.2 C47.2 C71.2 R17.2 C45.2 R7.2 C43.2 43.62,28.86 C41.2 ; R8.2 54.67,30.25 v2(54.62,30.3) ; R83.2 119.12,51.34 C111.2 ; 31.83,116.34 32.96,115.21 U17.4 U17.3 ; 31.83,116.34 v2(31.83,116.37) ; 31.83,116.34 C106.1 ; C66.2 C64.2 C62.2 96.73,28.86 98.18,28.86 C44.2 C52.2 C54.2 C56.2 C61.2 C42.2 C58.2 C50.2 C48.2 C60.2 C38.2 ; U29.3 36.8,63.02 36.8,60.42 C139.1 36.8,60.42 38.21,59 C140.1 ; U29.3 U29.2 ; C16.2 R38.2 43.44,105.65 C92.1 44.2,105.78 C93.1 ; v2(40.46,30.15) 40.41,30.1 40.41,29.23 40.42,29.23 C39.2 ; C101.1 56.32,69.77 58.17,69.77 ; R150.2 7.29,40.39 v2(6.86,40.39) ; v2(131.84,47.01) U20.3 v2(133.59,48.46) ; C109.2 105.15,59.34 R77.2 ; C120.2 R104.2 v2(112.28,73.31) ; R6.2 29.75,90.3 C1.2 ; C98.2 84.19,91.06 C99.2 ; U1.6 U1.7 U1.8 v2(29.33,81.64) ; C144.1 12.36,36.81 R147.2 ; v2(30.28,61.34) U25.3 U25.2 ; C38.2 C40.2 ; C38.2 v2(112.73,30.31) ; C122.2 98.28,73.21 R106.2 v2(99.68,73.16) ; U23.3 107,39.81 v2(106.32,40.48) 103.54,43.26 R127.2 ; C107.2 117.91,59.24 R75.2 ; U25.5 U25.6 U25.7 ; C125.2 152.24,106.58 152.24,108.78 151.07,109.96 v2(149.14,109.96) 146.95,109.96 146.31,109.32 C124.2 ; 42.27,44.46 v2(43.37,44.46) ; R129.2 103.58,35.74 104.27,35.05 v2(106.3,35.05) ; 58.17,69.77 v2(58.17,68.92) ; 58.17,69.77 C100.1 ; R61.2 72.77,66.28 U27.1 ; R16.2 C6.2 ; C110.2 R78.2
  BOTTOM w0.762: C130.1 85.95,61.93 v3(83.57,64.31) ; U24.3 62.01,51.18 61.55,50.72 ; 61.55,49.48 61.55,50.72 ; 61.55,49.48 61.53,49.49 61.53,49.58 ; 61.55,49.48 61.54,49.47 61.54,48.42 ; 61.55,50.72 v2(61.55,50.87) ; 61.54,48.42 v2(61.55,48.42) ; 61.54,48.42 62.19,47.77 64.06,47.77 U24.5
  BOTTOM w0.889: U21.3 v2(131.64,39.81)
  BOTTOM w2.032: J1.K6 J1.K4
  vias: v4(52.13,43.41) v4(52.15,41.33) v4(53.9,63.23) v4(53.93,61.15) v4(53.93,59.09) v4(54.17,43.4) v4(54.19,41.31) v4(56.03,63.32) v4(56.05,61.24) v4(56.05,59.18) v4(56.22,43.3) v4(56.25,41.22) v4(56.25,39.13) v4(58.26,43.28) v4(58.29,41.2) v4(58.29,39.14) v4(58.33,37.37) v4(132.49,72.06) v4(132.49,66.8) v4(132.49,61.63) v4(132.49,57.53) v4(133.53,72.06) v4(133.53,66.8) v4(133.53,61.63) v4(133.53,57.53) v4(134.56,72.06) v4(134.56,66.8) v4(134.56,61.63) v4(134.56,57.53) v4(135.59,72.06) v4(135.59,66.8) v4(135.59,61.63) v4(135.59,57.53) v4(136.62,72.06) v4(136.62,66.8) v4(136.62,61.63) v4(136.62,57.53) v4(137.66,72.06) v4(137.66,66.8) v4(137.66,61.63) v4(137.66,57.53) v4(138.69,72.06) v4(138.69,66.8) v4(138.69,61.63) v4(138.69,57.53) v4(144.61,101.71) v4(144.61,97.48) v4(144.61,93.38) v4(144.61,88.2) v4(145.65,101.71) v4(145.65,97.48) v4(145.65,93.38) v4(145.65,88.2) v4(146.68,101.71) v4(146.68,97.48) v4(146.68,93.38) v4(146.68,88.2) v4(147.71,101.71) v4(147.71,97.48) v4(147.71,93.38) v4(147.71,88.2) v4(148.74,101.71) v4(148.74,97.48) v4(148.74,93.38) v4(148.74,88.2) v4(149.77,101.71) v4(149.77,97.48) v4(149.77,93.38) v4(149.77,88.2) v4(150.81,101.71) v4(150.81,97.48) v4(150.81,93.38) v4(150.81,88.2)
